# Altium PCB PROC091F.PcbDoc (part 1 of 8)
Units mil, origin at the board's own origin, x right, y up, seen from the top; angles counter-clockwise.
Board outline 3590.95 x 906.17 mil, 8 copper layers (Top Layer, GND1, Sig1, PWR1, PWR2, Sig2, GND2, Bottom Layer), stack 63.146 mil thick; 420 components, 316 nets, 1432 pads, 774 vias.
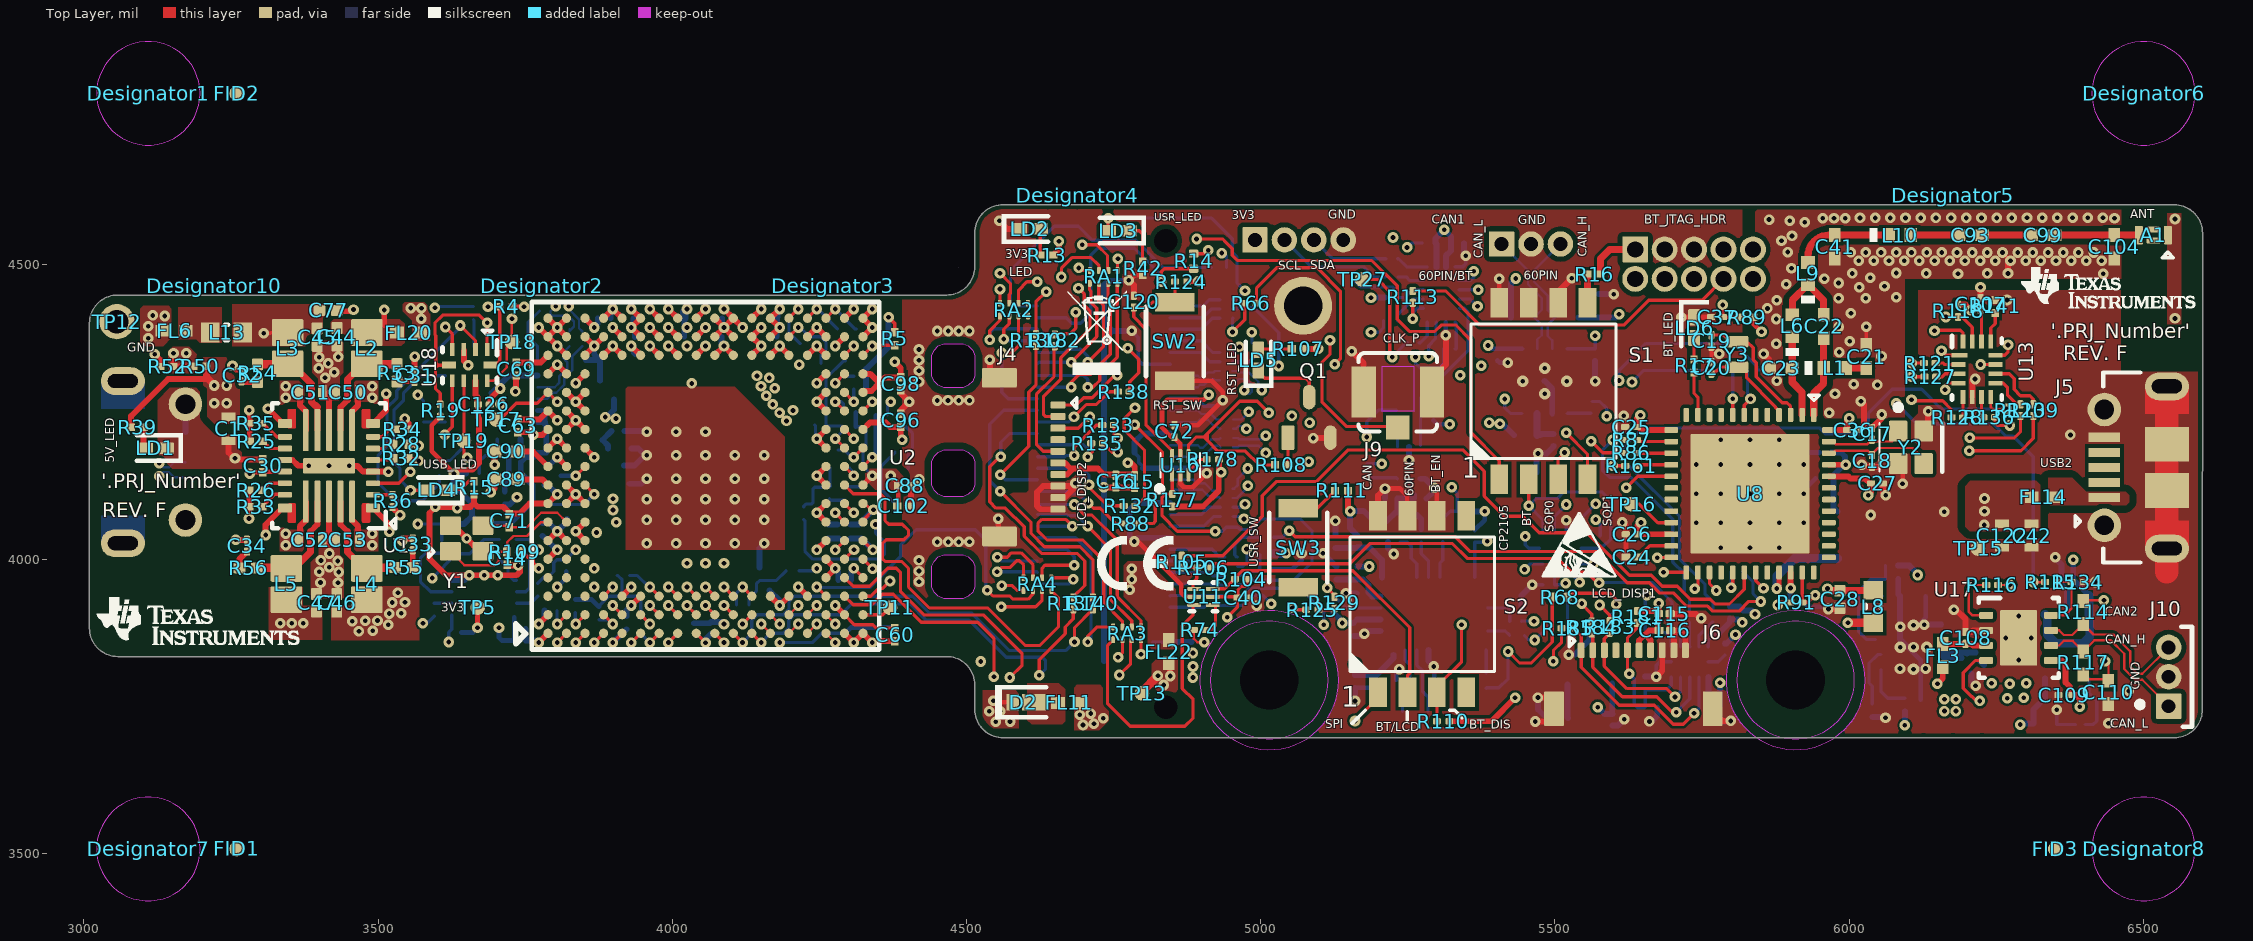
[diagram p0: Top Layer view]
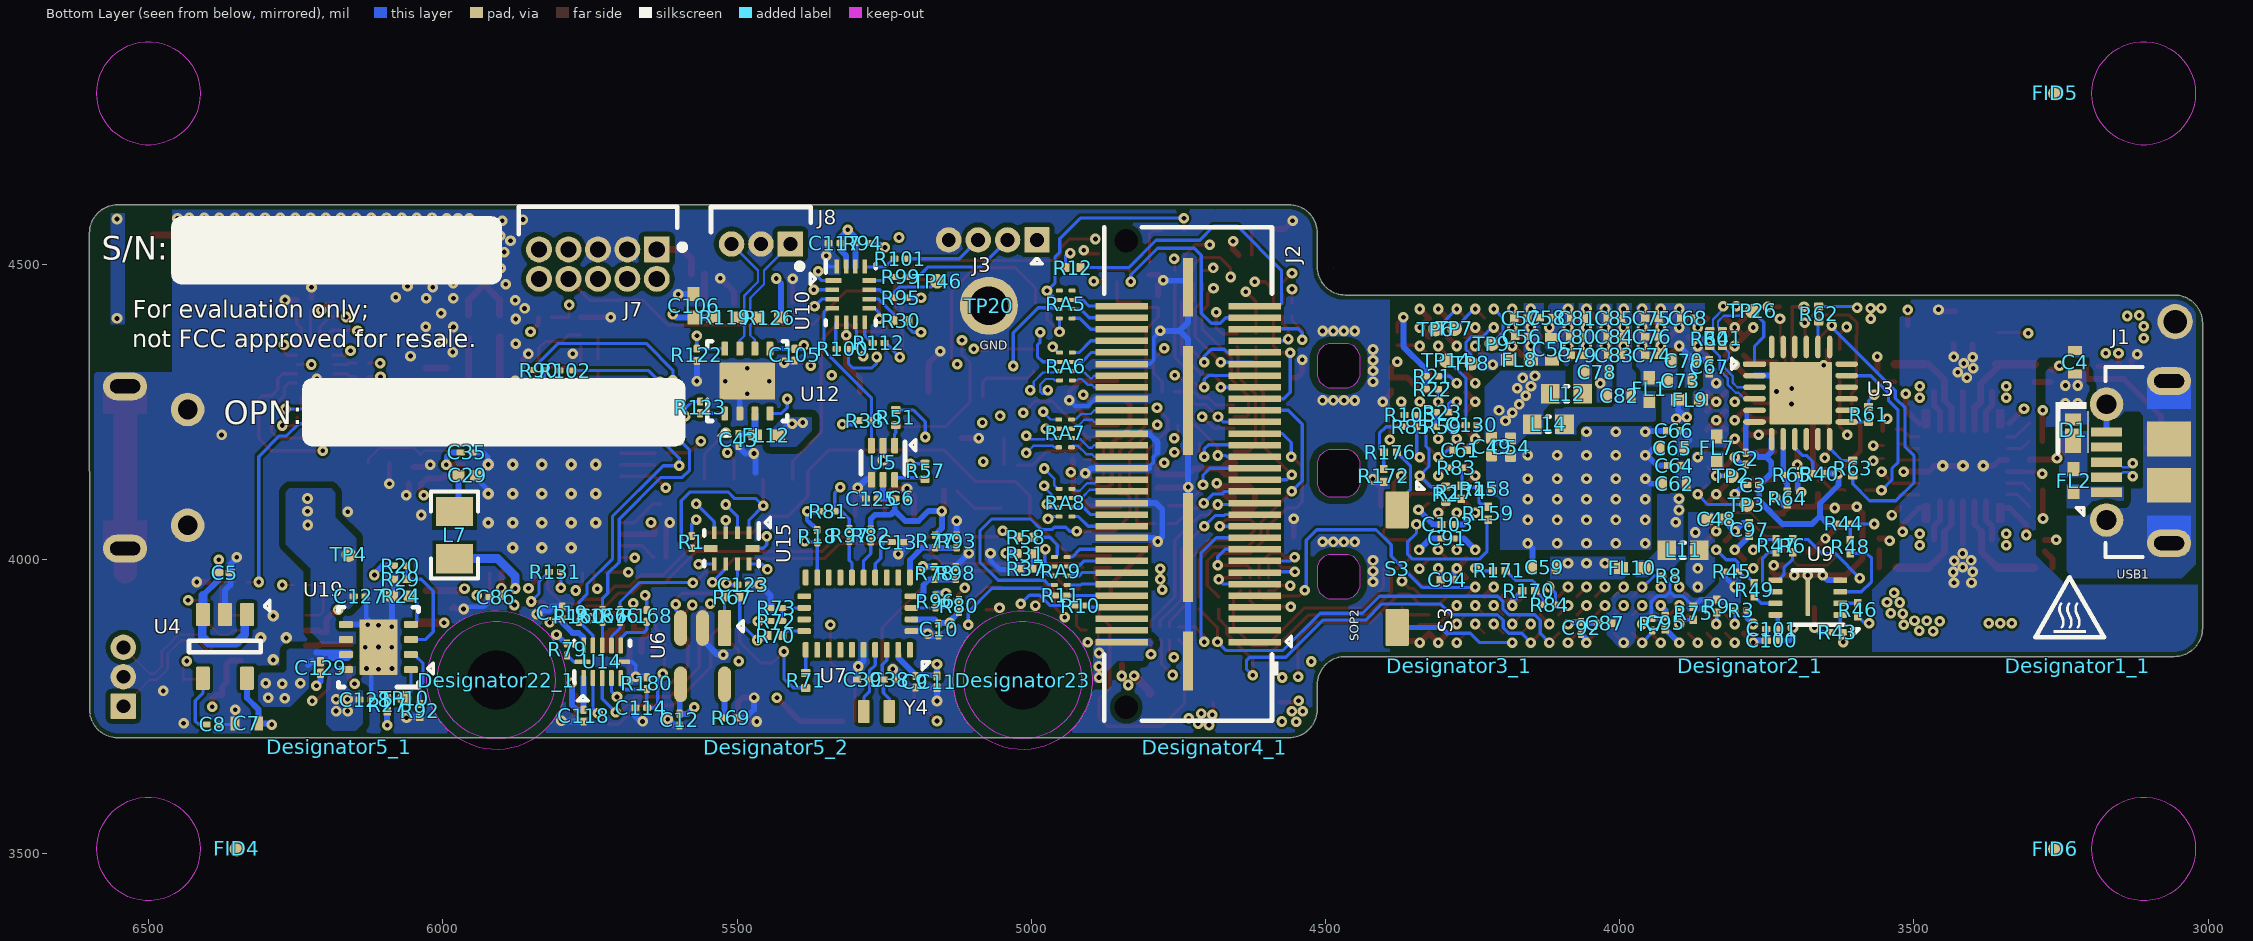
[diagram p1: Bottom Layer view, seen from below]
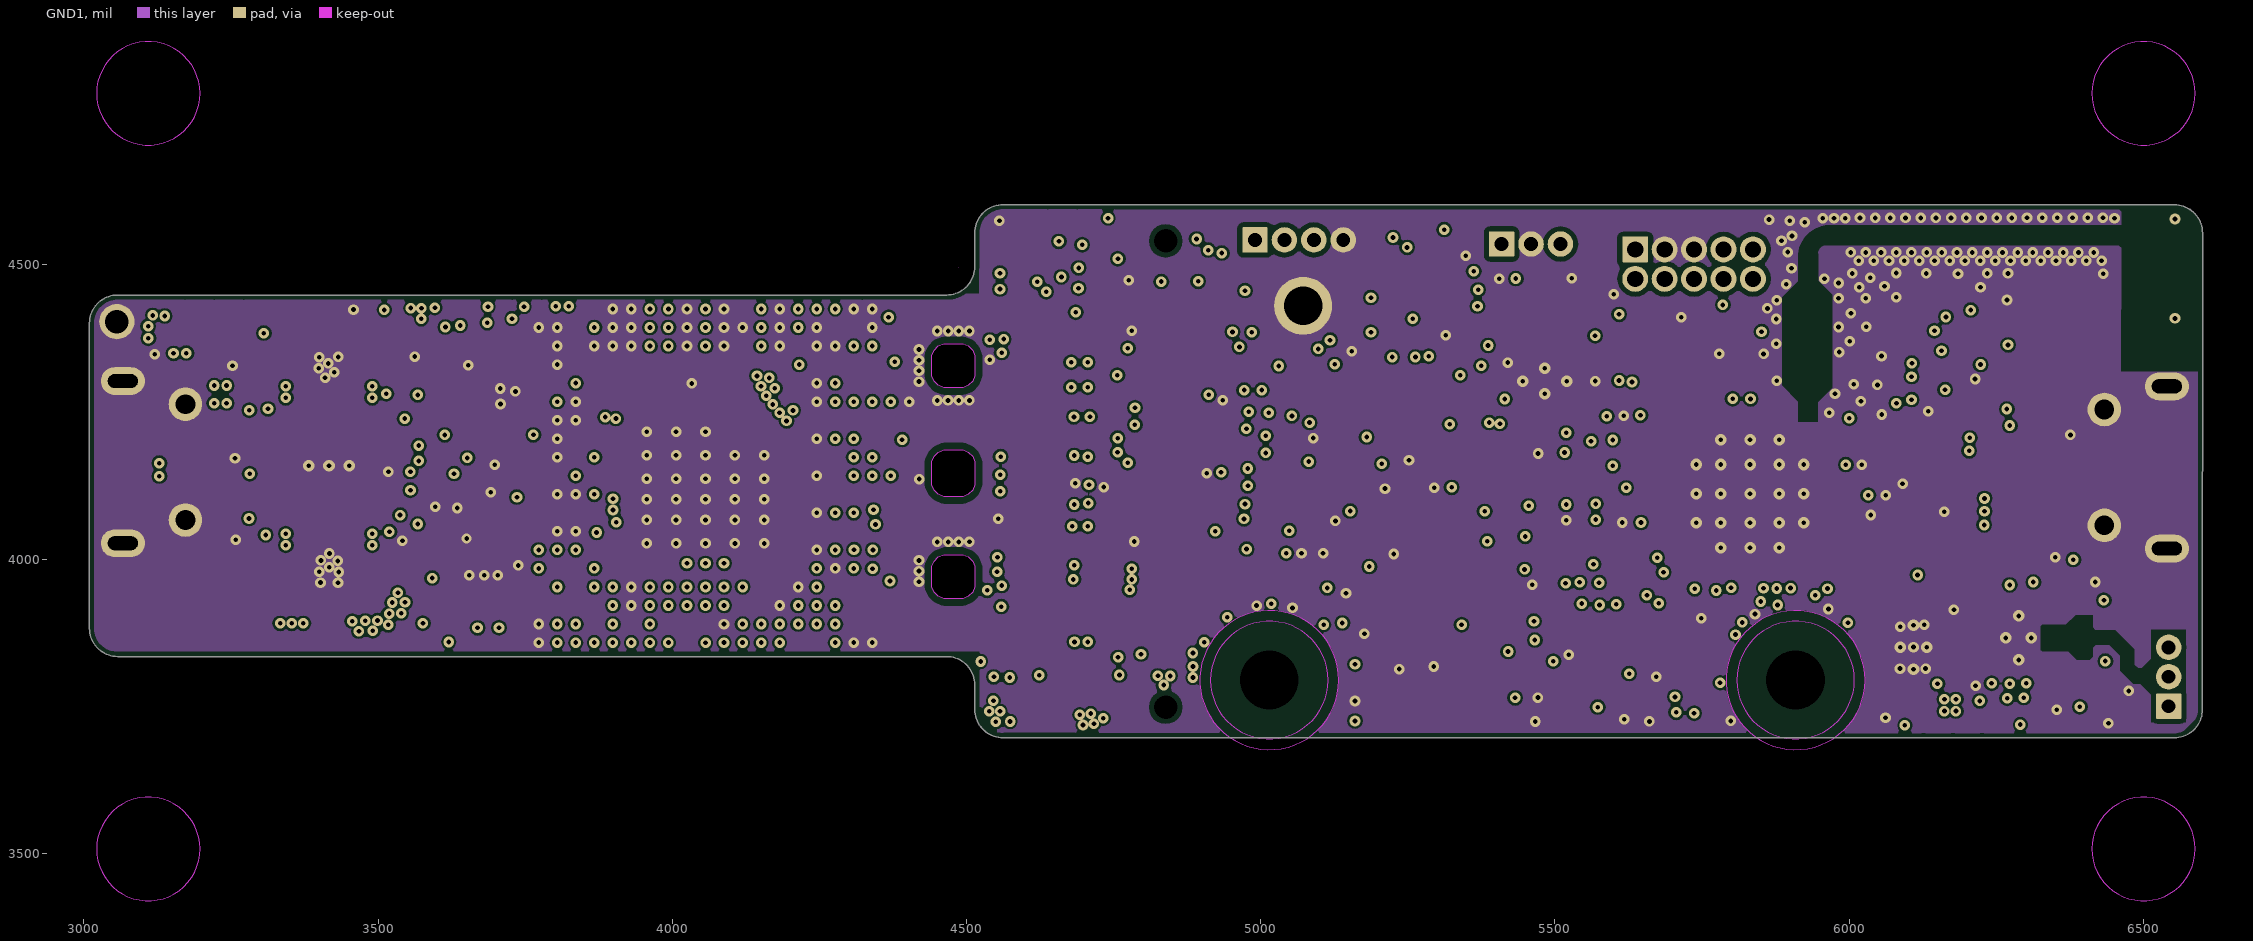
[diagram p2: GND1]
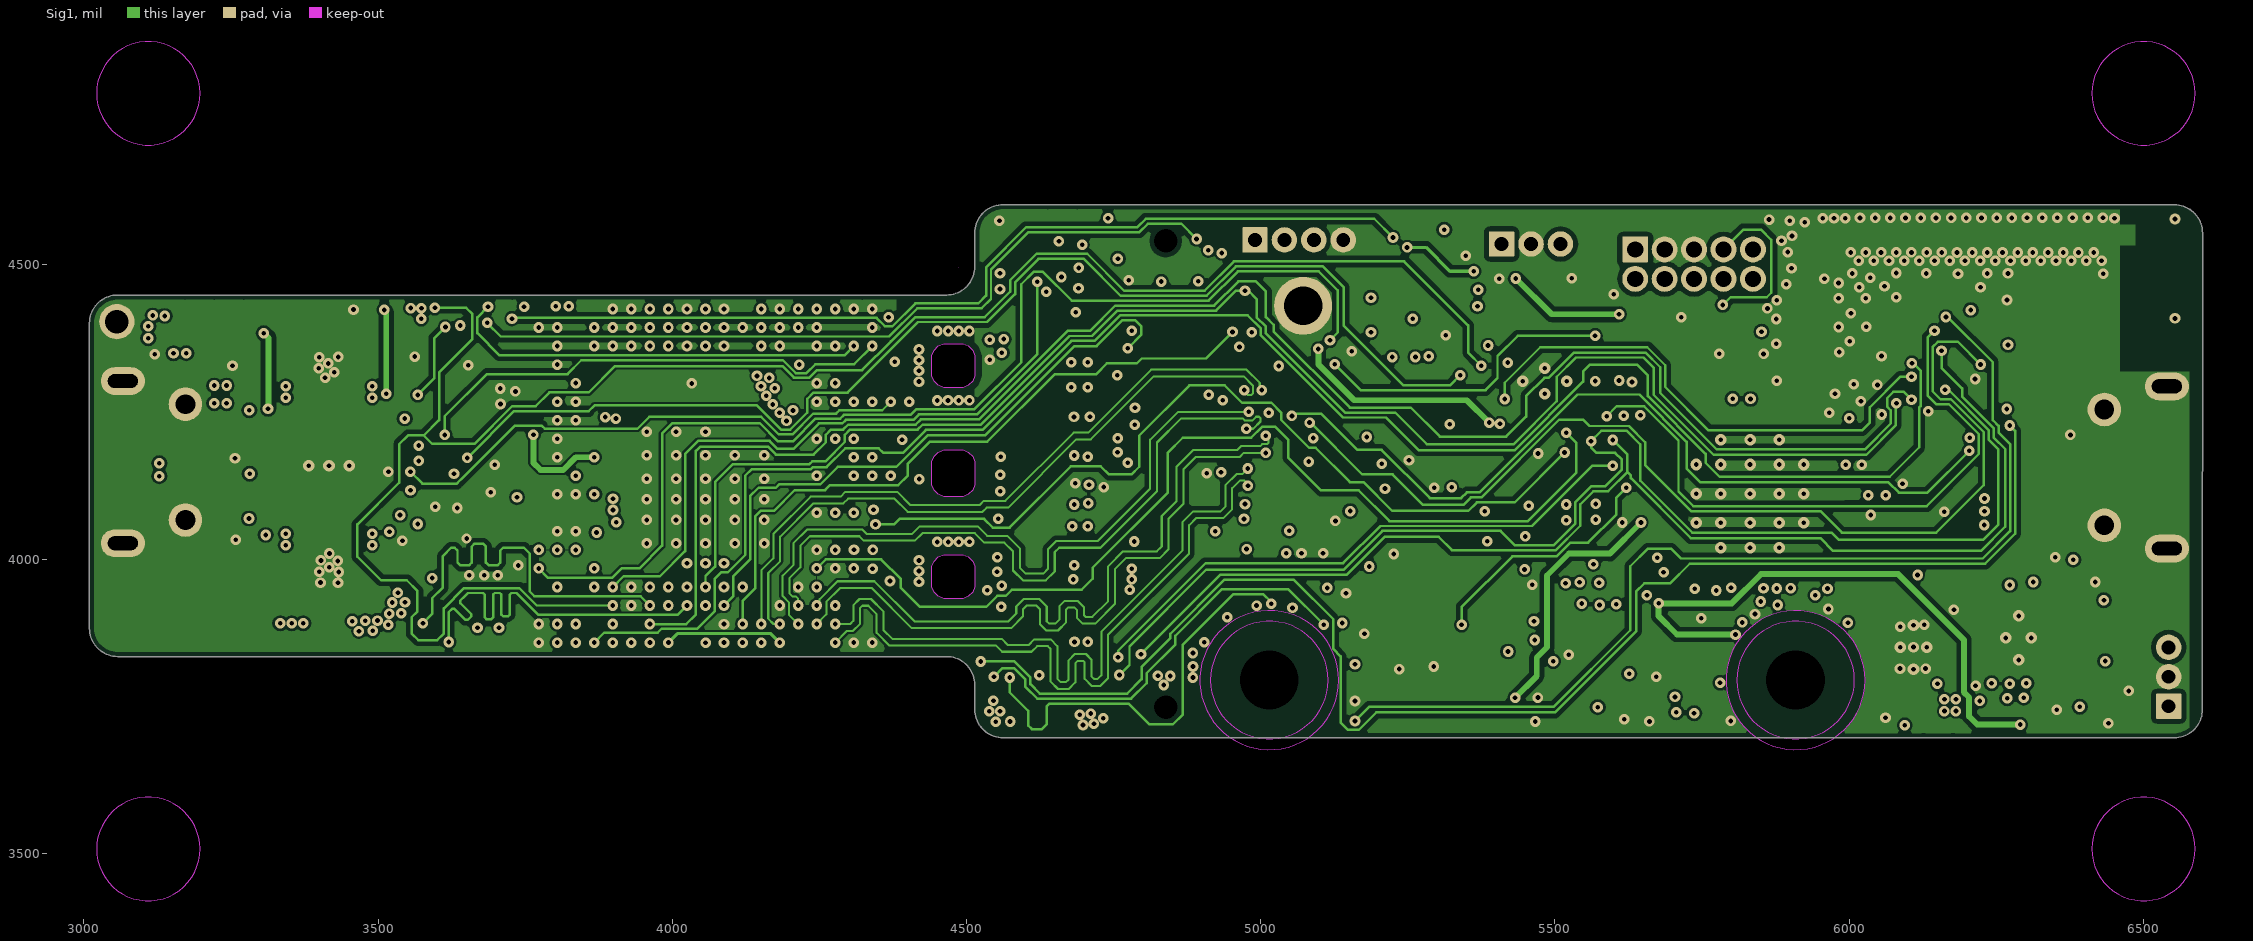
[diagram p3: Sig1]
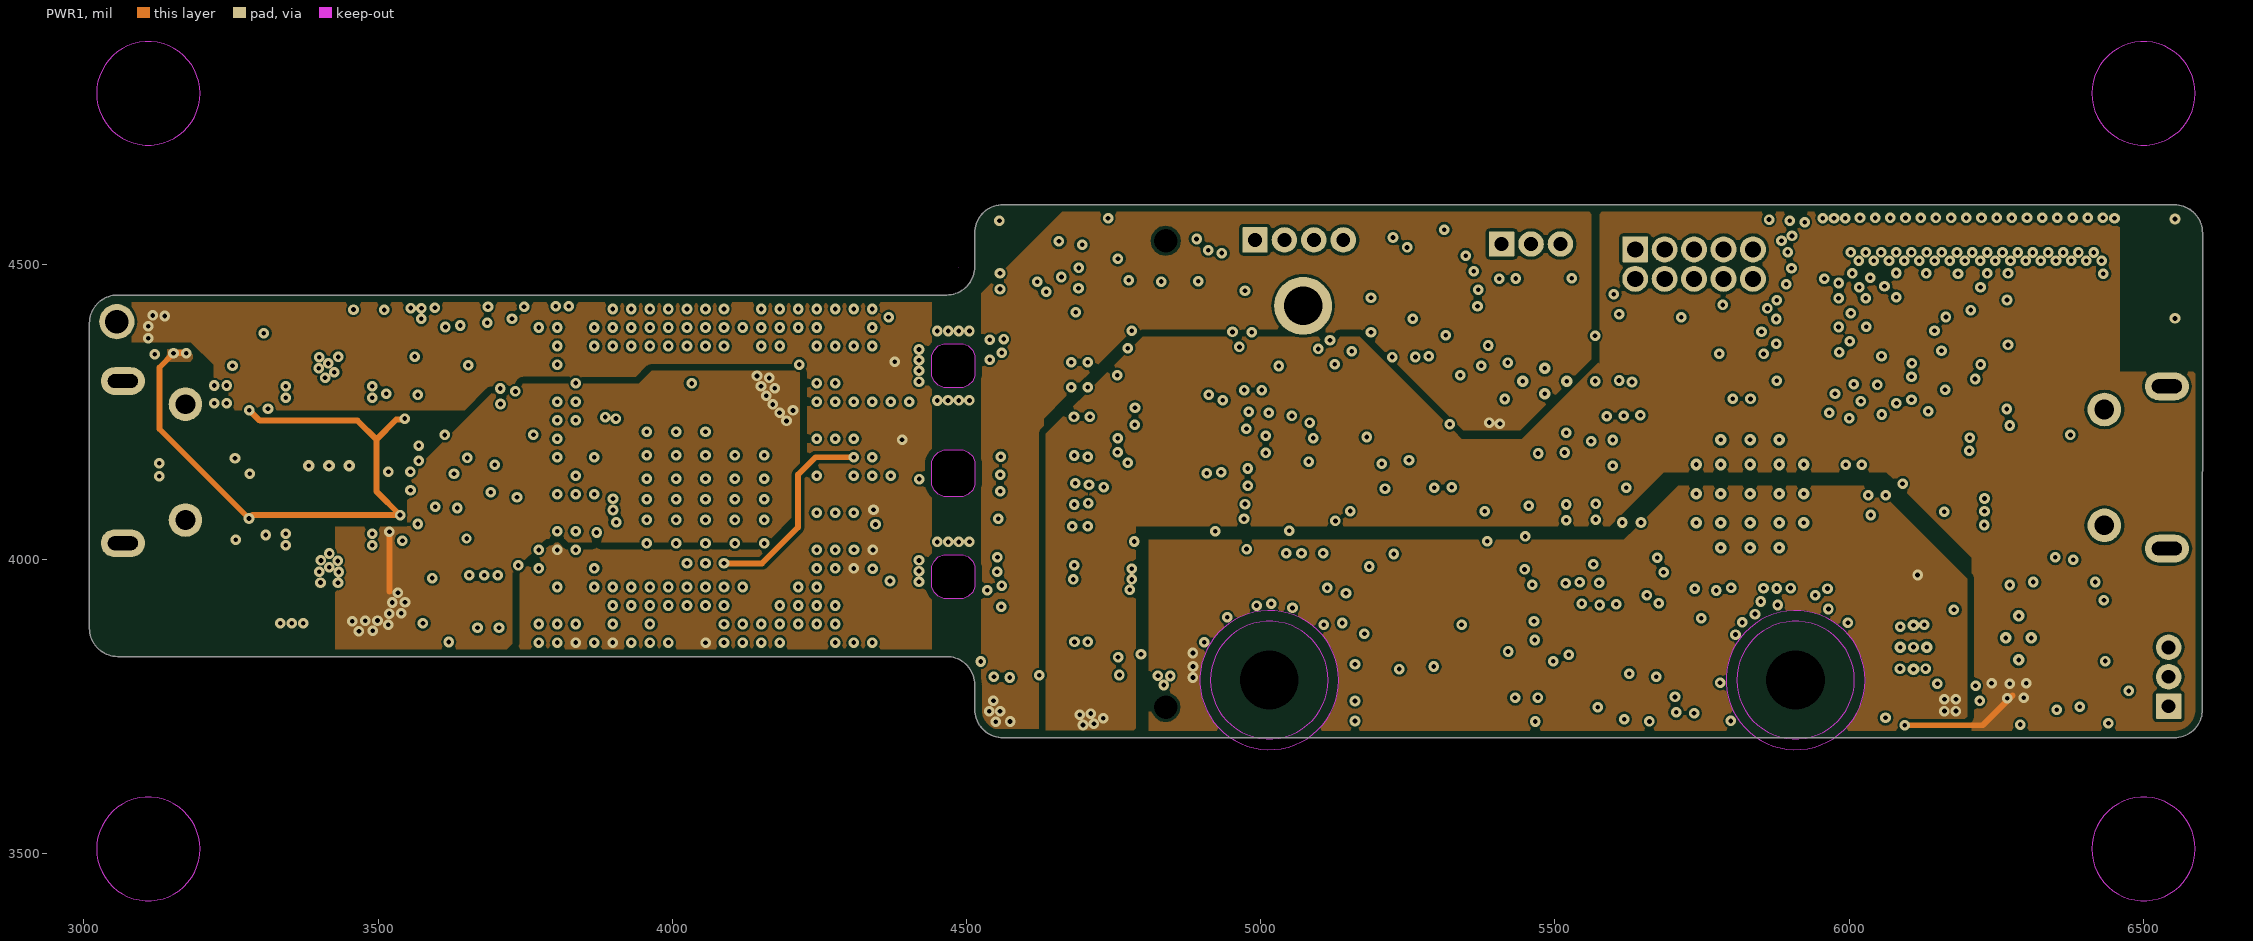
[diagram p4: PWR1]
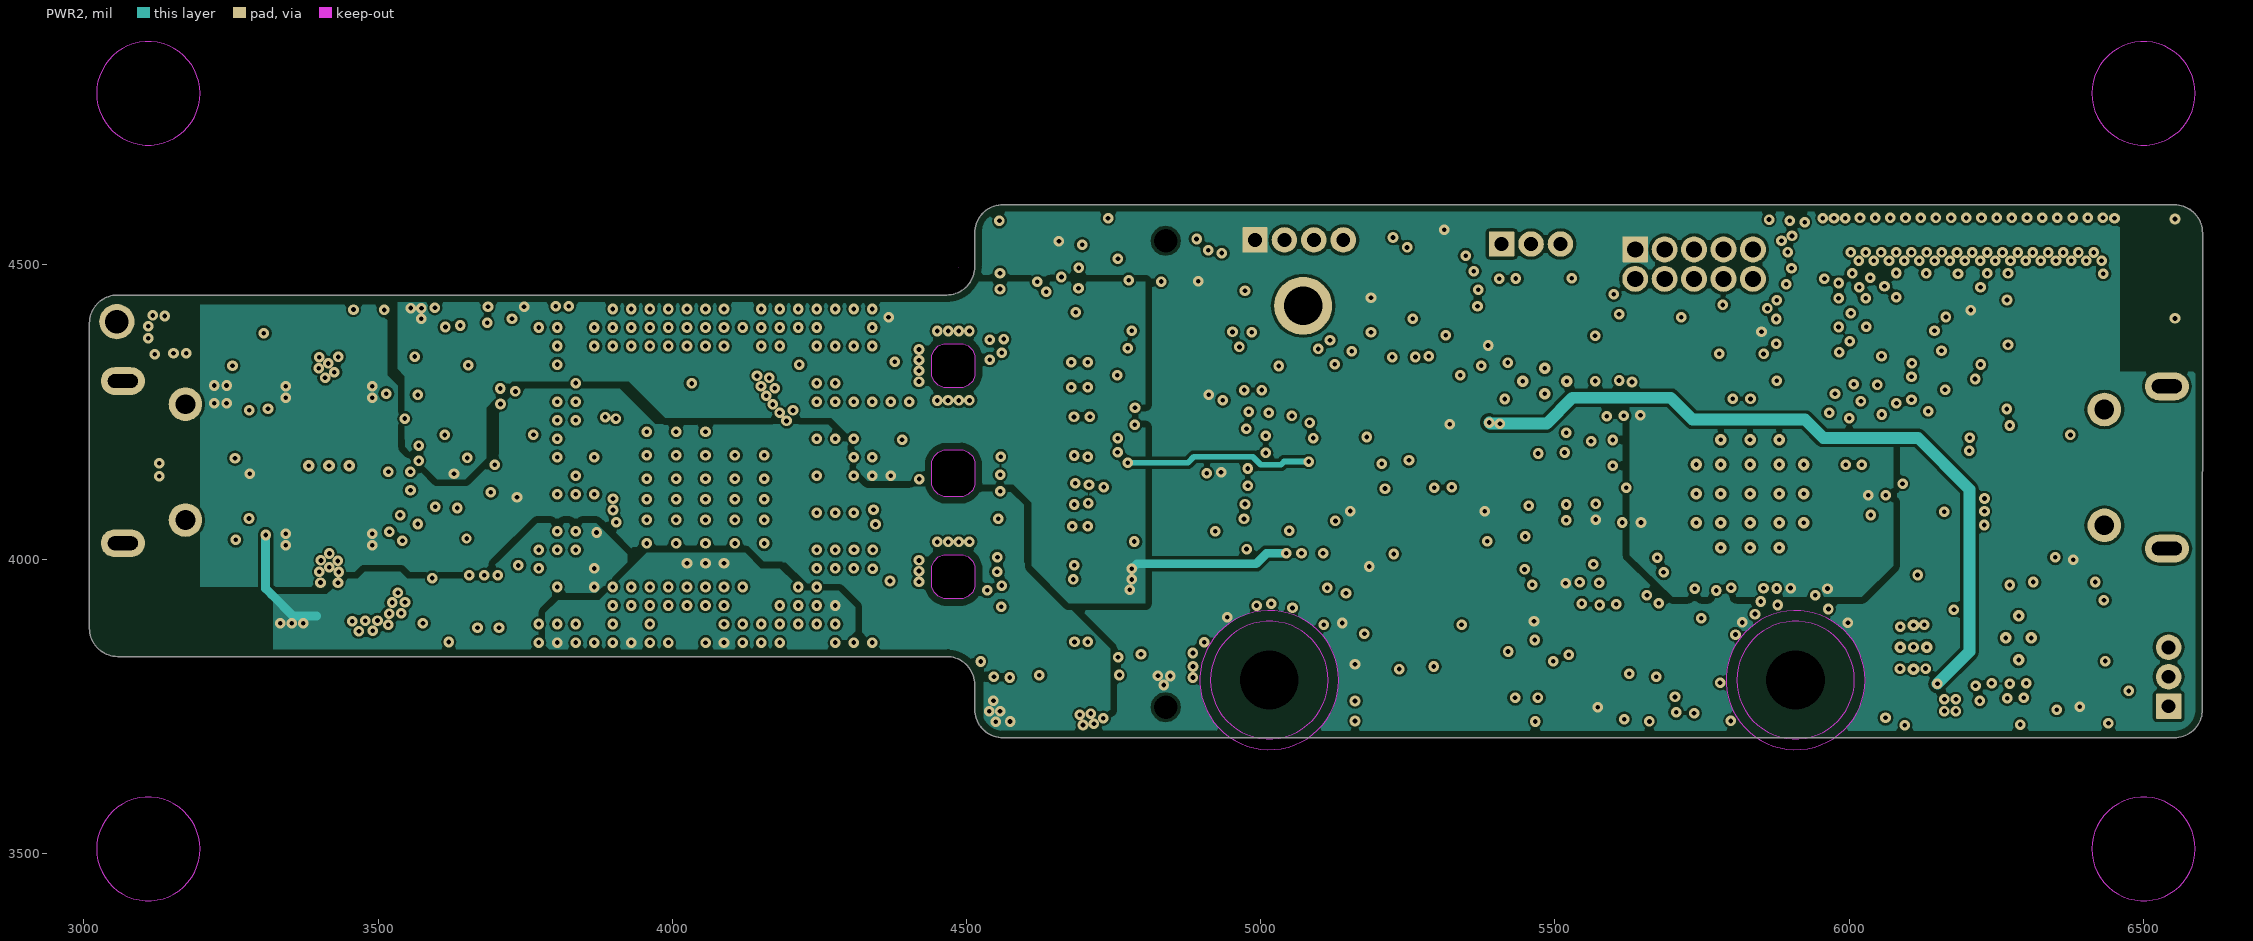
[diagram p5: PWR2]
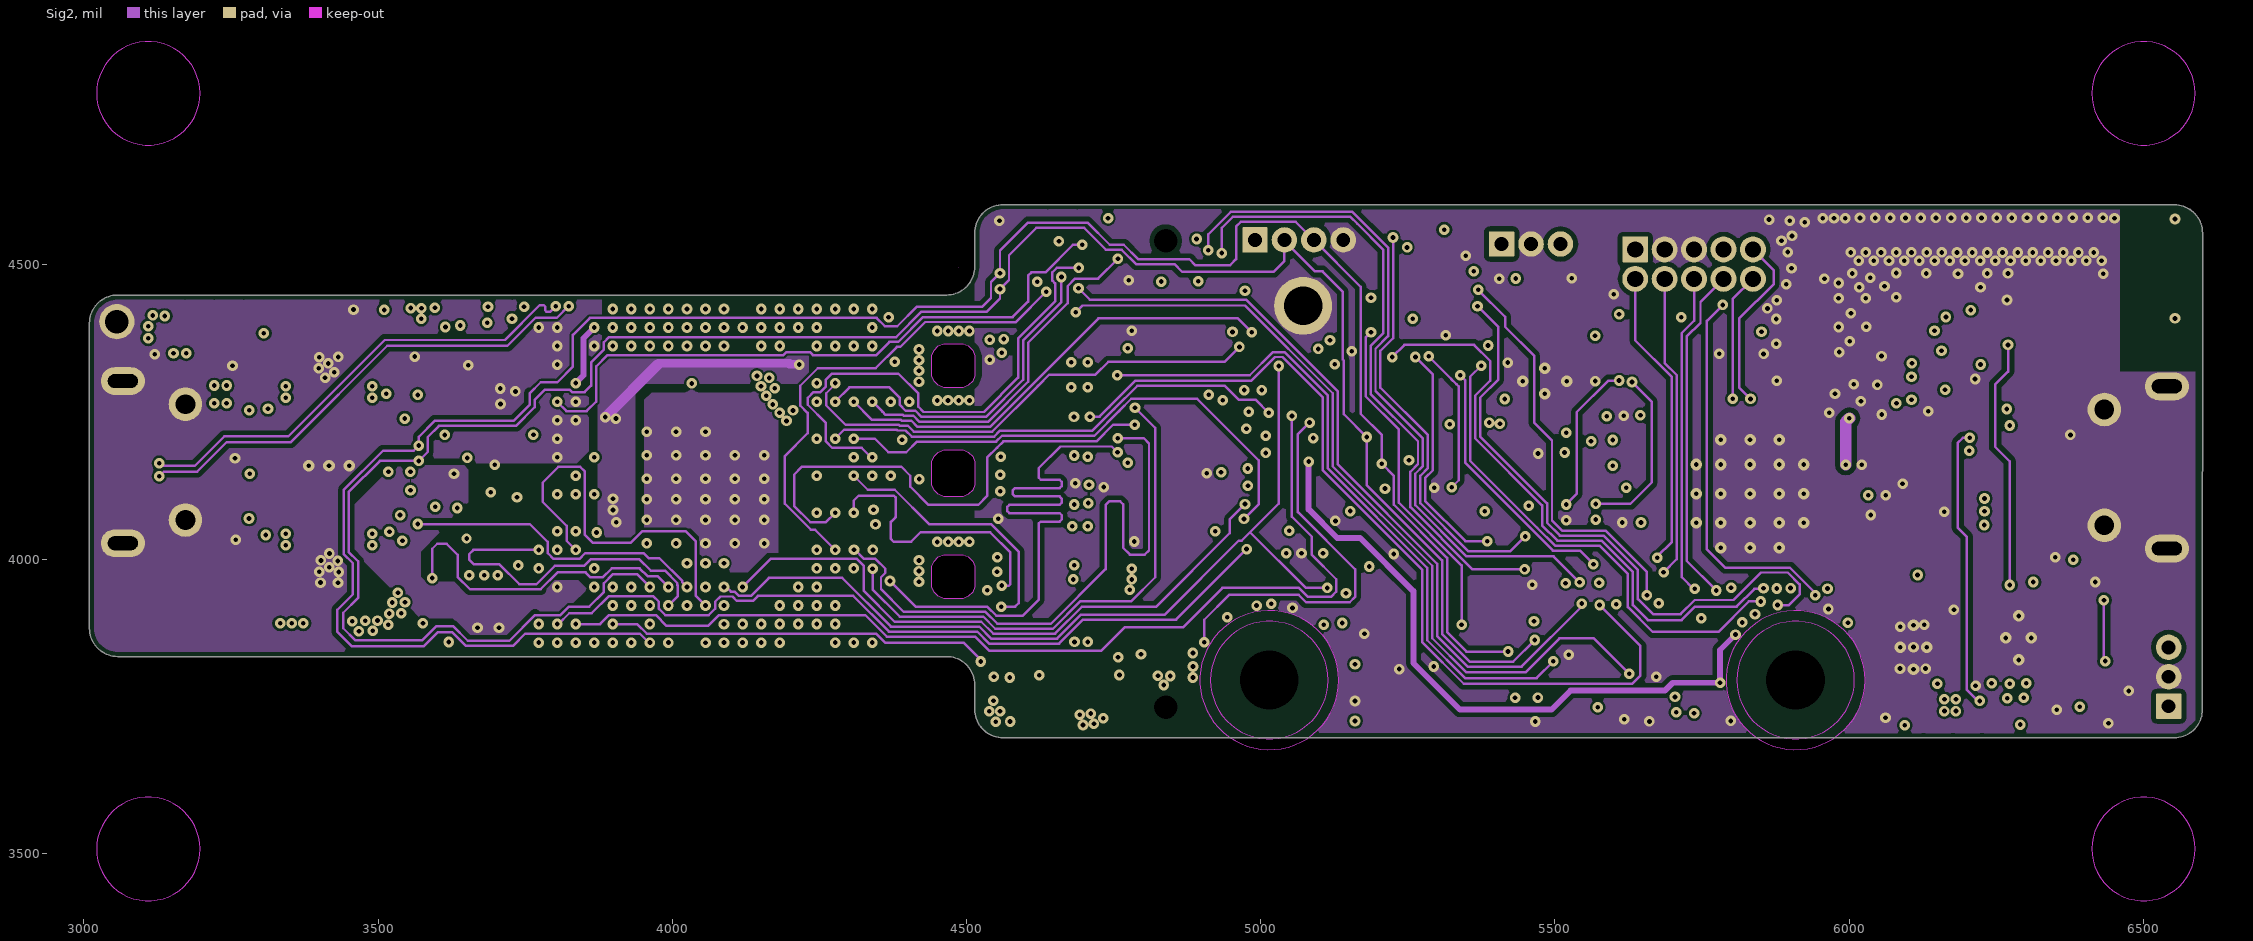
[diagram p6: Sig2]
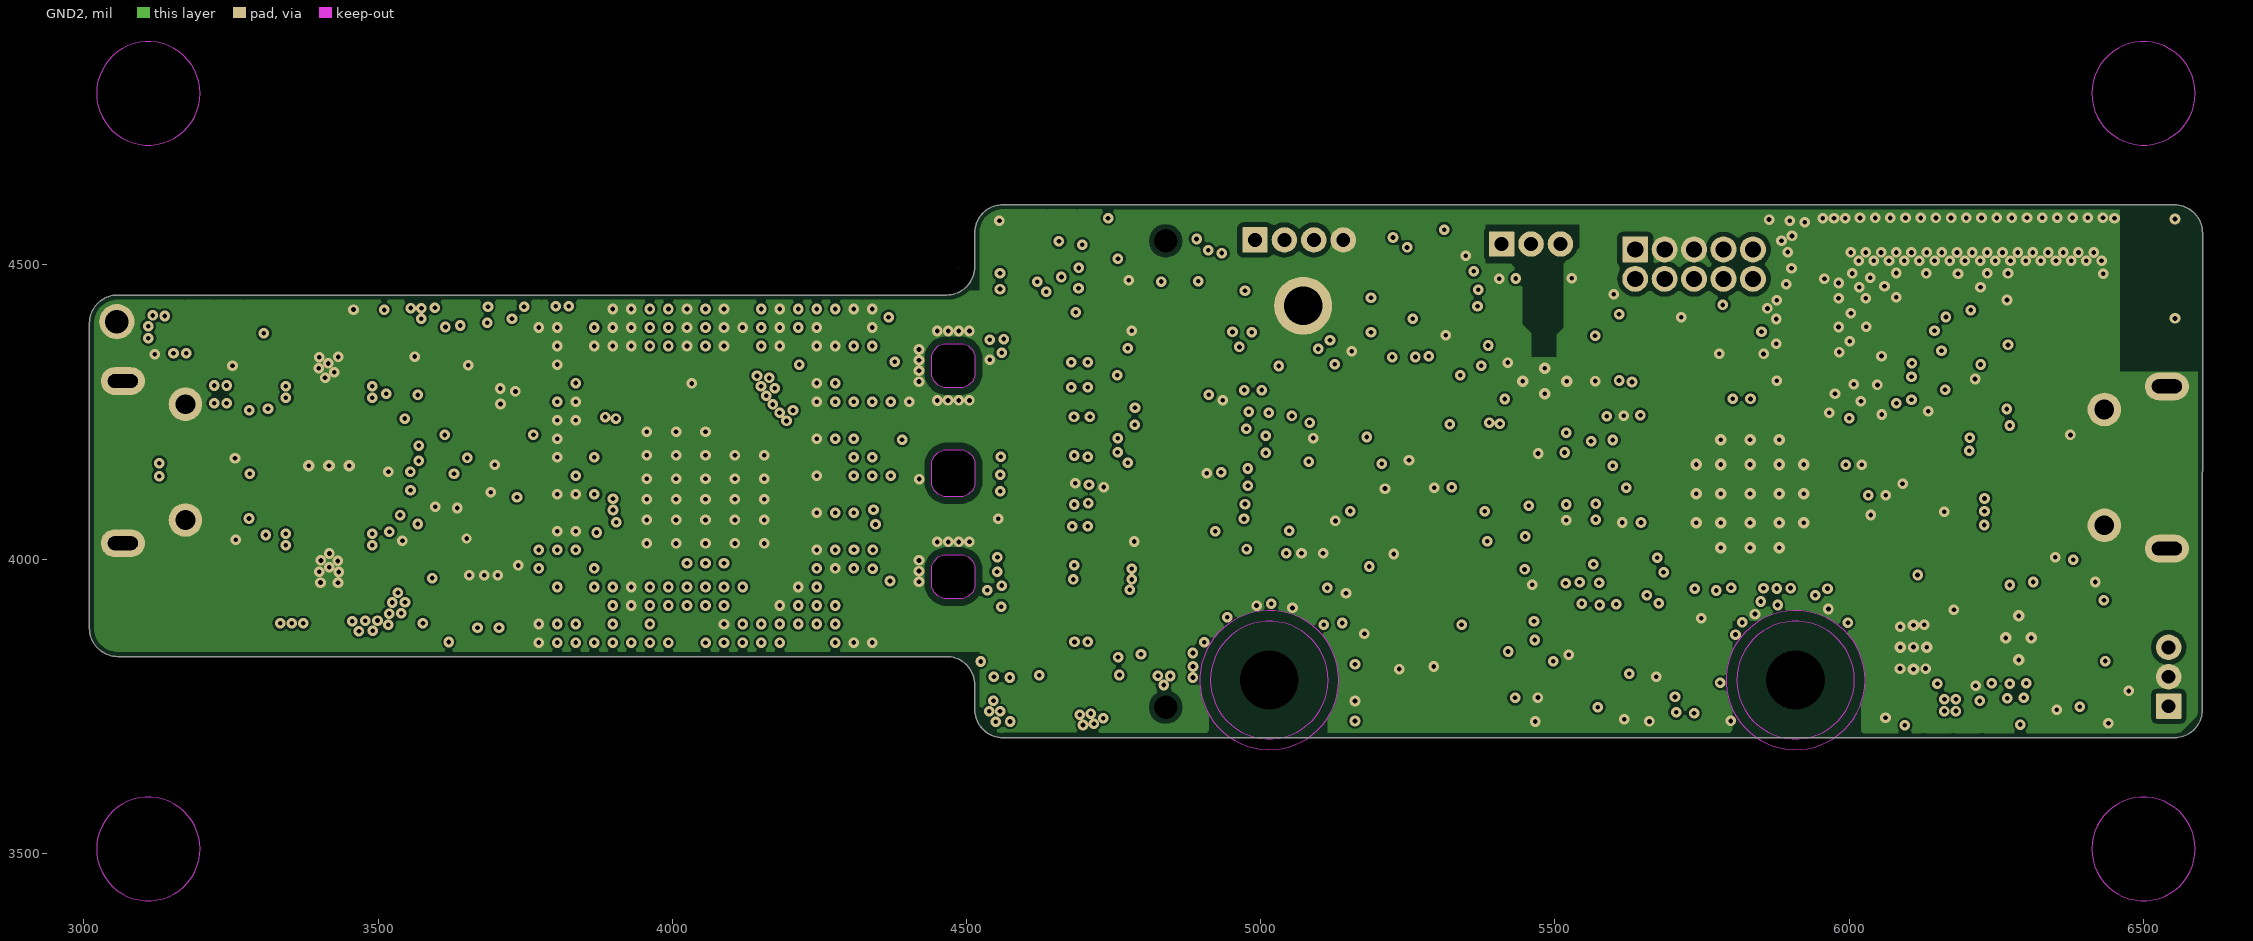
[diagram p7: GND2]

## Layer stack, top to bottom
Top Solder: solder mask 0.5, Solder Resist, Dk 3.5
Top Layer: signal copper 1.373
Dielectric1: core 3.7, FR-4 High Tg, Dk 4.2
GND1: signal copper 2.4
Dielectric3: dielectric 4.5, FR-4 High Tg, Dk 4.2
Sig1: signal copper 1.2
Dielectric2: dielectric 12, FR-4 High Tg, Dk 4.2
PWR1: signal copper 2.4
Dielectric4: dielectric 8, FR-4 High Tg, Dk 4.2
PWR2: signal copper 2.4
Dielectric5: dielectric 12, FR-4 High Tg, Dk 4.2
Sig2: signal copper 1.2
Dielectric8: dielectric 4.5, FR-4 High Tg, Dk 4.2
GND2: signal copper 2.4
Dielectric9: dielectric 3.7, FR-4 High Tg, Dk 4.2
Bottom Layer: signal copper 1.373
Bottom Solder: solder mask 0.5, Solder Resist, Dk 3.5

## Board outline
3057.58,3834.46 4466.14,3834.46 cw(c4466.14,3786.46) 4514.14,3786.46 4514.14,3744.46 ccw(c4562.14,3744.46) 4562.14,3696.46 4562.14,3696.51 6552.27,3696.2 ccw(c6552.27,3744.2) 6600.27,3744.2 6600.29,3744.2 6600.53,4554.1 ccw(c6552.53,4554.1) 6552.53,4602.1 6552.53,4602.08 4562.15,4602.33 4562.15,4602.37 ccw(c4562.15,4554.37) 4514.15,4554.37 4514.15,4496.76 cw(c4466.15,4496.76) 4466.15,4448.76 3057.58,4448.76 ccw(c3057.58,4400.76) 3009.58,4400.76 3009.58,3882.46 ccw(c3057.58,3882.46)
cut-out: 4466.37,4365.95 4494.11,4365.95 4503.29,4362.14 4510.33,4355.11 4514.13,4345.92 4514.13,4340.95 4514.13,4316.3 4514.13,4311.32 4510.33,4302.14 4503.29,4295.1 4494.11,4291.3 4489.13,4291.3 4461.39,4291.3 4452.2,4295.1 4445.17,4302.14 4441.37,4311.32 4441.37,4316.3 4441.37,4340.95 4441.37,4345.92 4445.17,4355.11 4452.2,4362.14 4461.39,4365.95 4466.37,4365.95
cut-out: 4489.13,4185.46 4494.1,4185.46 4503.29,4181.66 4510.32,4174.62 4514.13,4165.44 4514.13,4160.46 4514.13,4131.32 4514.13,4126.35 4510.32,4117.16 4503.29,4110.12 4494.1,4106.32 4489.13,4106.32 4466.36,4106.32 4461.39,4106.32 4452.2,4110.12 4445.17,4117.16 4441.36,4126.35 4441.36,4131.32 4441.36,4160.46 4441.36,4165.44 4445.17,4174.62 4452.2,4181.66 4461.39,4185.46 4489.13,4185.46
cut-out: 4466.36,4007.54 4494.1,4007.54 4503.28,4003.73 4510.32,3996.7 4514.12,3987.51 4514.12,3982.54 4514.12,3957.89 4514.12,3952.91 4510.32,3943.73 4503.28,3936.69 4494.1,3932.89 4489.12,3932.89 4461.38,3932.89 4452.19,3936.69 4445.16,3943.73 4441.36,3952.91 4441.36,3957.89 4441.36,3982.54 4441.36,3987.51 4445.16,3996.7 4452.19,4003.73 4461.38,4007.54 4466.36,4007.54
cut-out: 4477.74,4007.54
cut-out: 4486.41,4495.33

## Design rules (kind name [scope] priority, off if disabled: settings)
AcuteAngle [All] p1: minimum=4.50000000000000E+0001 checktracksonly=TRUE
AssemblyTestPointUsage [All] p1: valid=2
BoardOutlineClearance BoardOutlineClearance_1 [InNet('GND')] p1: gap=8 ignorepadtopadclearanceinfootprint=FALSE
BoardOutlineClearance [NOT(OnTopSilkscreen OR OnBottomSilkscreen)] p2: gap=12 ignorepadtopadclearanceinfootprint=FALSE except(0: Text-OutlineEdge)
Clearance Keepout [(OnLayer('Keep-Out Layer'))] p1: gap=0.01 ignorepadtopadclearanceinfootprint=FALSE except(5.9: THPad-THPad; 7: Arc-THPad Track-THPad THPad-Via; 8: THPad-Fill THPad-Poly THPad-Region)
Clearance RF_TRACE [InNetClass('RF')] p2: gap=4 ignorepadtopadclearanceinfootprint=FALSE except(0: Arc-Hole Track-Hole SMDPad-Hole THPad-Hole Via-Hole Fill-Hole Poly-Hole Region-Hole Text-Hole; 2: Arc-Text Track-Text SMDPad-Text THPad-Text Via-Text Fill-Text Poly-Text Region-Text Text-Text; 5.9: THPad-THPad; 6: SMDPad-Fill SMDPad-Poly SMDPad-Region Via-Fill Via-Poly Via-Region; 7: Arc-THPad Track-THPad THPad-Via; 8: THPad-Fill THPad-Poly THPad-Region; 10: Arc-Fill Arc-Poly Arc-Region Track-Fill Track-Poly Track-Region; 15: Fill-Fill Fill-Poly Fill-Region Poly-Poly Poly-Region Region-Region)
Clearance AOP_T-B [WithinRoom('BGA') vs OnOutside] p3: gap=4 ignorepadtopadclearanceinfootprint=TRUE except(0: Arc-Hole Track-Hole SMDPad-Hole THPad-Hole Via-Hole Fill-Hole Poly-Hole Region-Hole Text-Hole; 3.8: SMDPad-Via; 3.9: Arc-Via Track-Via; 5.9: THPad-THPad; 7: Arc-THPad Track-THPad THPad-Via; 8: THPad-Fill THPad-Poly THPad-Region Fill-Fill Fill-Poly Fill-Region Poly-Poly Poly-Region Region-Region)
Clearance AOP_Sig [WithinRoom('BGA') AND (OnLayer('sig1') or OnLayer('sig2'))] p4: gap=4 ignorepadtopadclearanceinfootprint=FALSE except(0: Arc-Hole Track-Hole SMDPad-Hole THPad-Hole Via-Hole Fill-Hole Poly-Hole Region-Hole Text-Hole; 3.5: Arc-Arc Arc-Track Arc-Via Arc-Text Track-Track Track-Via Track-Text SMDPad-Text THPad-Text Via-Via Via-Text Fill-Text Poly-Text Region-Text Text-Text; 3.8: SMDPad-Via; 5.9: THPad-THPad; 7: Arc-THPad Track-THPad THPad-Via; 8: SMDPad-THPad THPad-Fill THPad-Poly THPad-Region; 15: Fill-Fill Fill-Poly Fill-Region Poly-Poly Poly-Region Region-Region)
Clearance 50E_INNERlayer [(OnLayer('sig1') or OnLayer('Sig2'))] p5: gap=4.2 ignorepadtopadclearanceinfootprint=TRUE except(0: Arc-Hole Track-Hole SMDPad-Hole THPad-Hole Via-Hole Fill-Hole Poly-Hole Region-Hole Text-Hole; 2: SMDPad-Text Fill-Text Poly-Text Region-Text Text-Text; 5.9: THPad-THPad; 6: SMDPad-Fill SMDPad-Poly SMDPad-Region; 7: Arc-THPad Track-THPad THPad-Via; 8: Arc-Fill Arc-Poly Arc-Region Track-Fill Track-Poly Track-Region THPad-Fill THPad-Poly THPad-Region; 12: Fill-Fill Fill-Poly Fill-Region Poly-Poly Poly-Region Region-Region)
Clearance INNERlayer [(OnLayer('pwr1') or OnLayer('pwr2'))] p6: gap=8 ignorepadtopadclearanceinfootprint=TRUE except(0: Arc-Hole Track-Hole SMDPad-Hole THPad-Hole Via-Hole Fill-Hole Poly-Hole Region-Hole Text-Hole; 2: SMDPad-Text Fill-Text Poly-Text Region-Text Text-Text; 4: Via-Fill Via-Poly Via-Region; 4.2: Arc-Text Track-Text THPad-Text Via-Via Via-Text; 5: THPad-Fill THPad-Poly THPad-Region; 5.9: THPad-THPad; 6: Arc-Via Arc-Fill Arc-Poly Arc-Region Track-Via Track-Fill Track-Poly Track-Region; 7: THPad-Via; 12: Fill-Fill Fill-Poly Fill-Region Poly-Poly Poly-Region Region-Region)
Clearance 100E [InDifferentialPairClass('100E')] p7: gap=8 ignorepadtopadclearanceinfootprint=FALSE except(0: Arc-Hole Track-Hole SMDPad-Hole THPad-Hole Via-Hole Fill-Hole Poly-Hole Region-Hole Text-Hole; 2: Arc-Text Track-Text THPad-Text Via-Text Fill-Text Poly-Text Region-Text Text-Text; 4: Arc-SMDPad Track-SMDPad SMDPad-SMDPad SMDPad-THPad SMDPad-Via SMDPad-Text Via-Via Via-Fill Via-Poly Via-Region; 5: Arc-Via Track-Via; 5.9: THPad-THPad; 6: SMDPad-Fill SMDPad-Poly SMDPad-Region Fill-Fill Fill-Poly Fill-Region Poly-Poly Poly-Region Region-Region; 7: Arc-THPad Track-THPad THPad-Via)
Clearance 90E_OUTSIDE [InDifferentialPairClass('90E') vs OnOutside] p8: gap=6 ignorepadtopadclearanceinfootprint=TRUE except(0: Arc-Hole Track-Hole SMDPad-Hole THPad-Hole Via-Hole Fill-Fill Fill-Poly Fill-Region Fill-Hole Poly-Poly Poly-Region Poly-Hole Region-Region Region-Hole Text-Hole; 2: Arc-Text Track-Text SMDPad-Text THPad-Text Via-Text Fill-Text Poly-Text Region-Text Text-Text; 3.8: SMDPad-Via; 4: Arc-SMDPad Track-SMDPad SMDPad-SMDPad Via-Via Via-Fill Via-Poly Via-Region; 4.5: Arc-Arc Arc-Track Arc-Via Track-Track Track-Via; 5.9: THPad-THPad; 7: Arc-THPad Track-THPad SMDPad-THPad THPad-Via; 8: THPad-Fill THPad-Poly THPad-Region)
Clearance [All] p9: gap=1 ignorepadtopadclearanceinfootprint=TRUE except(0: Arc-Hole Track-Hole SMDPad-Hole THPad-Hole Via-Hole Fill-Hole Poly-Hole Region-Hole Text-Hole; 4: SMDPad-SMDPad SMDPad-Via Via-Via Via-Fill Via-Poly Via-Region; 5: Arc-SMDPad Arc-Fill Arc-Poly Arc-Region Track-SMDPad Track-Fill Track-Poly Track-Region; 5.9: THPad-THPad; 6: Arc-Arc Arc-Track Arc-Via Track-Track Track-Via SMDPad-Fill SMDPad-Poly SMDPad-Region; 7: Arc-THPad Track-THPad SMDPad-THPad THPad-Via; 8: THPad-Fill THPad-Poly THPad-Region; 12: Fill-Fill Fill-Poly Fill-Region Poly-Poly Poly-Region Region-Region)
Clearance "SAME NET" [All] p10: gap=0 ignorepadtopadclearanceinfootprint=FALSE except(0.5: SMDPad-Text; 5.9: THPad-THPad)
ComponentClearance ComponentClearance_R199_187 [InComponent('R199') vs InComponent('R187')] p1: gap=-1 collisioncheckmode=3 verticalgap=10 showdistances=FALSE
ComponentClearance ComponentClearance_R188_204 [InComponent('R188') vs InComponent('R204')] p2: gap=-1 collisioncheckmode=3 verticalgap=10 showdistances=FALSE
ComponentClearance [All] p3: gap=1 collisioncheckmode=3 verticalgap=10 showdistances=FALSE
ComponentClearance ComponentClearance_MountingHoles_FiducialMarks [InComponentClass('Mounting Holes') vs InComponentClass('FiducialMark')] p4: gap=50 collisioncheckmode=3 verticalgap=10 showdistances=FALSE
ComponentClearance ComponentClearance_Shunt [InComponentClass('Header') vs InComponentClass('Shunt')] p5: gap=1 collisioncheckmode=3 verticalgap=0 showdistances=FALSE
ComponentClearance ComponentClearance_Logo [InComponentClass('Logo')] p6: gap=50 collisioncheckmode=3 verticalgap=10 showdistances=FALSE
ComponentClearance ComponentClearance_ScrewToNut [(HasFootprint('NY PMS 440 0025 PH')) vs (HasFootprint('Keystone_1902C'))] p7: gap=5 collisioncheckmode=3 verticalgap=10 showdistances=FALSE
ComponentClearance ComponentClearance_MountingHoles [InComponentClass('Mounting Holes')] p8: gap=20 collisioncheckmode=3 verticalgap=100000 showdistances=FALSE
ComponentClearance ComponentClearance_SmallPassives [HasFootprint('0201*') or HasFootprint('0402*') or HasFootprint('0508') or HasFootprint('0603*') or HasFootprint('0612') or HasFootprint('0805*') or HasFootprint('0815*') or HasFootprint('0830*') or HasFootprint('1206*') or HasFootprint('1210*') or HasFootprint('1808*') or HasFootprint('1812*') or HasFootprint('1825*') or HasFootprint('2010*') or HasFootprint('2220*') or HasFootprint('2225*') or HasFootprint('2512*') or HasFootprint('2728*') or HasFootprint('3518*') vs HasFootprint('0201*') or HasFootprint('0402*') or HasFootprint('0508') or HasFootprint('0603*') or HasFootprint('0612') or HasFootprint('0805*') or HasFootprint('0815*') or HasFootprint('0830*') or HasFootprint('1206*') or HasFootprint('1210*') or HasFootprint('1808*') or HasFootprint('1812*') or HasFootprint('1825*') or HasFootprint('2010*') or HasFootprint('2220*') or HasFootprint('2225*') or HasFootprint('2512*') or HasFootprint('2728*') or HasFootprint('3518*')] p9: gap=10 collisioncheckmode=3 verticalgap=10 showdistances=FALSE
ComponentClearance ComponentClearance_THtoSMT [IsThruComponent vs IsSMTComponent] p10: gap=5 collisioncheckmode=3 verticalgap=20 showdistances=FALSE
ComponentClearance ComponentClearance_THtoTH [IsThruComponent vs IsThruComponent] p11: gap=20 collisioncheckmode=3 verticalgap=30 showdistances=FALSE
DiffPairsRouting Diff_100E [InDifferentialPairClass('100E')] p1: maxlimit=10 minlimit=7 mostfreqgap=10 toplayer_maxgap=7 toplayer_prefgap=7 toplayer_minwidth=4 toplayer_maxwidth=4 toplayer_prefwidth=4 midlayer1_mingap=10 midlayer1_minwidth=15 midlayer1_maxwidth=15 midlayer1_prefwidth=15 midlayer2_mingap=8 midlayer2_maxgap=8 midlayer2_prefgap=8 midlayer2_minwidth=3.5 midlayer2_maxwidth=3.5 midlayer2_prefwidth=3.5 midlayer3_mingap=10 midlayer3_minwidth=15 midlayer3_maxwidth=15 midlayer3_prefwidth=15 midlayer6_mingap=10 midlayer6_minwidth=15 midlayer6_maxwidth=15 midlayer6_prefwidth=15 midlayer7_mingap=8 midlayer7_maxgap=8 midlayer7_prefgap=8 midlayer7_minwidth=3.5 midlayer7_maxwidth=3.5 midlayer7_prefwidth=3.5 midlayer8_mingap=10 midlayer8_minwidth=15 midlayer8_maxwidth=15 midlayer8_prefwidth=15 bottomlayer_maxgap=7 bottomlayer_prefgap=7 bottomlayer_minwidth=4 bottomlayer_maxwidth=4 bottomlayer_prefwidth=4 maxuncoupledlength=500
DiffPairsRouting Diff_90E [InDifferentialPairClass('90E')] p2: maxlimit=100 minlimit=4.5 mostfreqgap=10 toplayer_maxgap=4.5 toplayer_prefgap=4.5 toplayer_minwidth=4 toplayer_maxwidth=4 toplayer_prefwidth=4 midlayer1_mingap=10 midlayer1_minwidth=15 midlayer1_maxwidth=15 midlayer1_prefwidth=15 midlayer2_mingap=6 midlayer2_maxgap=6 midlayer2_prefgap=6 midlayer2_minwidth=4 midlayer2_maxwidth=4 midlayer2_prefwidth=4 midlayer3_mingap=10 midlayer3_minwidth=15 midlayer3_maxwidth=15 midlayer3_prefwidth=15 midlayer6_mingap=10 midlayer6_minwidth=15 midlayer6_maxwidth=15 midlayer6_prefwidth=15 midlayer7_mingap=6 midlayer7_maxgap=6 midlayer7_prefgap=6 midlayer7_minwidth=4 midlayer7_maxwidth=4 midlayer7_prefwidth=4 midlayer8_mingap=10 midlayer8_minwidth=15 midlayer8_maxwidth=15 midlayer8_prefwidth=15 bottomlayer_maxgap=4.5 bottomlayer_prefgap=4.5 bottomlayer_minwidth=4 bottomlayer_maxwidth=4 bottomlayer_prefwidth=4 maxuncoupledlength=1000
DiffPairsRouting Diff_120E [All] p3: maxlimit=10 minlimit=6.1 mostfreqgap=10 toplayer_maxgap=6.1 toplayer_prefgap=6.1 toplayer_minwidth=4 toplayer_maxwidth=4 toplayer_prefwidth=4 midlayer1_mingap=10 midlayer1_minwidth=15 midlayer1_maxwidth=15 midlayer1_prefwidth=15 midlayer2_mingap=10 midlayer2_minwidth=15 midlayer2_maxwidth=15 midlayer2_prefwidth=15 midlayer3_mingap=10 midlayer3_minwidth=15 midlayer3_maxwidth=15 midlayer3_prefwidth=15 midlayer6_mingap=10 midlayer6_minwidth=15 midlayer6_maxwidth=15 midlayer6_prefwidth=15 midlayer7_mingap=10 midlayer7_minwidth=15 midlayer7_maxwidth=15 midlayer7_prefwidth=15 midlayer8_mingap=10 midlayer8_minwidth=15 midlayer8_maxwidth=15 midlayer8_prefwidth=15 bottomlayer_maxgap=6.1 bottomlayer_prefgap=6.1 bottomlayer_minwidth=4 bottomlayer_maxwidth=4 bottomlayer_prefwidth=4 maxuncoupledlength=500
FabricationTestPointUsage TestPointUsage [All] p1: valid=2 allowmultiple=FALSE
FabricationTestpoint Testpoint [All] p1: side=3 testpointundercomponent=TRUE minsize=40 maxsize=100 preferedsize=60 minholesize=0 maxholesize=40 preferedholesize=32 testpointgrid=1 allowsidetop=TRUE allowsidebottom=TRUE usegrid=TRUE gridtolerance=0.01
FanoutControl Fanout_LCC [IsLCC] p1: bgadir=Out bgaviamode=Centered fanoutstyle=Auto fanoutdirection=Alternating viagrid=1 // Fanout_LCC (Default Rule)
FanoutControl Fanout_BGA [IsBGA] p2: bgadir=Out bgaviamode=Centered fanoutstyle=Auto fanoutdirection=Alternating viagrid=1 // Fanout_BGA (Default Rule)
FanoutControl Fanout_Default [All] p4: bgadir=Out bgaviamode=Centered fanoutstyle=Auto fanoutdirection=Alternating viagrid=1 // Fanout_Default (Default Rule)
FanoutControl Fanout_Small [(CompPinCount < 5)] p5: bgadir=Out bgaviamode=Centered fanoutstyle=Auto fanoutdirection=OutThenIn viagrid=1 // Fanout_Small (Default Rule)
HoleSize [All] p1: absolutevalues=TRUE maxlimit=251 minlimit=5.9 maxpercent=80.000 minpercent=20.000
MatchedLengths [InNetClass('LVDS_IC')] p1: tolerance=20 checknetsindiffpair=FALSE checkdiffpairvsdiffpair=TRUE checkxsignals=TRUE checkothers=TRUE
MatchedLengths AR_DMM [InxSignalClass('AR_DMM')] p2: tolerance=100 checknetsindiffpair=FALSE checkdiffpairvsdiffpair=TRUE checkxsignals=TRUE checkothers=TRUE
MatchedLengths USB [InxSignalClass('USB')] p3: tolerance=5 checknetsindiffpair=TRUE checkdiffpairvsdiffpair=FALSE checkxsignals=FALSE checkothers=FALSE
MatchedLengths QSPI [InxSignalClass('QSPI')] p4: tolerance=100 checknetsindiffpair=FALSE checkdiffpairvsdiffpair=TRUE checkxsignals=TRUE checkothers=TRUE
MatchedLengths SPI [InxSignalClass('SPI & HOSTINT')] p5: tolerance=200 checknetsindiffpair=FALSE checkdiffpairvsdiffpair=TRUE checkxsignals=TRUE checkothers=TRUE
MatchedLengths JTAG [InxSignalClass('JTAG')] p6: tolerance=100 checknetsindiffpair=FALSE checkdiffpairvsdiffpair=TRUE checkxsignals=TRUE checkothers=TRUE
MinimumAnnularRing MinimumAnnularRing_ThermalPadVias [IsVia and InAnyComponent] p1: minimumring=3
MinimumAnnularRing [All] p2: minimumring=3
MinimumSolderMaskSliver [All] p1: minsoldermaskwidth=3
PlaneConnect [All] p1: planeconnectstyle=Direct reliefexpansion=10 reliefentries=4 reliefconductorwidth=10 reliefairgap=10
PolygonConnect [All] p1: connectstyle=Direct reliefconductorwidth=10 reliefentries=4 polygonreliefangle="90 Angle" airgapwidth=10
RoomDefinition BGA [InComponentClass('60GHz-AOP_IR_FLASH')] p1: confinementstyle=ConfineIn formatcopy=TRUE lockcomponents=FALSE outline 3757.84,4447.61 4382.71,4447.61 4382.71,3834 3757,3834
RoutingVias [All] p1: holewidth=8 width=18 viastyle="Through Hole" minholewidth=7.87 minwidth=17 maxholewidth=40 maxwidth=30
RoutingVias ThermalPadVias [IsVia and InAnyComponent] p2: holewidth=7.87 width=19.68 viastyle="Through Hole" minholewidth=7.87 minwidth=19.68 maxholewidth=12.99 maxwidth=23.62
SilkToBoardRegionClearance [Not ((IsComment or IsDesignator) And (Hide <> 'False')) and not InRegion(1000,500,4000,800)] p1:
SilkToSilkClearance [All] p1: silktosilkclearance=3
SilkToSolderMaskClearance SilkToComponentPadClearance [(IsPad or IsFill or IsRegion) and InAnycomponent] p1: minsilkscreentomaskgap=3 clearancetoexposedcopper=TRUE
SilkToSolderMaskClearance "Silk to Solder Mask Opening" [All] p2: minsilkscreentomaskgap=3 clearancetoexposedcopper=FALSE
SolderMaskExpansion [All] p1: expansion=1.97
Width RF [InNetClass('RF')] p1: maxlimit=100 minlimit=5.5 preferedwidth=10 toplayer_prefwidth=12 midlayer1_minwidth=10 midlayer1_maxwidth=10 midlayer2_minwidth=10 midlayer2_maxwidth=10 midlayer3_minwidth=10 midlayer3_maxwidth=10 midlayer6_minwidth=10 midlayer6_maxwidth=10 midlayer7_minwidth=10 midlayer7_maxwidth=10 midlayer8_minwidth=10 midlayer8_maxwidth=10 bottomlayer_minwidth=10 bottomlayer_maxwidth=10 minimp=50.000000 maximp=50.000000 favimp=50.000000
Width [All] p2: maxlimit=100 minlimit=4 preferedwidth=6 toplayer_maxwidth=40 toplayer_prefwidth=5.5 midlayer1_minwidth=4.2 midlayer1_maxwidth=20 midlayer1_prefwidth=4.2 midlayer2_minwidth=4.2 midlayer2_maxwidth=20 midlayer2_prefwidth=4.2 midlayer7_minwidth=4.2 midlayer7_maxwidth=20 midlayer7_prefwidth=4.2 midlayer8_minwidth=6 midlayer8_prefwidth=10 bottomlayer_maxwidth=40 bottomlayer_prefwidth=5.5 minimp=50.000000 maximp=50.000000 favimp=50.000000
15 further rules are at their usual default settings.

## Classes and differential pairs
net class LVDS_CONN: NetJ2_28 NetJ2_30 NetJ2_34 NetJ2_36 NetJ2_40 NetJ2_42 NetJ2_46 NetJ2_48
net class LVDS_IC: AR_LVDS_0_N AR_LVDS_0_P AR_LVDS_1_N AR_LVDS_1_P AR_LVDS_CLK_N AR_LVDS_CLK_P AR_LVDS_FRCLK_N AR_LVDS_FRCLK_P
differential pair class 120E: CAN CAN2
differential pair class 100E: AR_LVDS_0 AR_LVDS_1 AR_LVDS_CLK AR_LVDS_FRCLK AR_XTAL X48M
differential pair class 90E: NewDifferentialPair1 USB
net class RF: NetA1_4 NetC21_2 NetC22_1 NetC41_1 NetC93_1 NetC93_2 RF_N RF_P
component class PROC091F_RST_GPIOs_I2C: C6 C9 C10 C11 C12 C13 C38 C39 C72 C120 C125 J3 LD2 LD3 LD5 Q1 R13 R18 R38 R42 R51 R57 R67 R68 R69 R70 R71 R72 R73 R77 R78 R80 R81 R82 R93 R96 R97 R98 R107 R108 R111 R124 R125 R129 R177 R178 SW2 SW3 TP15 TP20 U5 U6 U7 U16 Y4
component class PROC091F_PMIC: C30 C31 C32 C33 C34 C44 C45 C46 C47 C48 C49 C50 C51 C52 C53 C54 C77 FL1 FL8 FL9 FL10 FL20 L2 L3 L4 L5 L11 L12 L13 L14 LD1 R25 R26 R28 R31 R32 R33 R34 R35 R36 R37 R39 R50 R52 R53 R54 R55 R56 TP5 TP12 U1
component class PROC091F_HD_CONN_PWR_SW: C127 C128 C129 D2 FL11 FL22 J2 R10 R11 R12 R14 R20 R24 R27 R29 R58 R88 R92 R130 R132 R133 R135 R137 R138 R140 RA1 RA2 RA3 RA4 RA5 RA6 RA7 RA8 RA9 TP10 TP13 U19
component class PROC091F_FLASH_USB_TO_UART: C1 C2 C3 C4 C100 C101 C126 D1 FL2 J1 LD4 R6 R15 R19 R40 R41 R43 R44 R45 R46 R47 R48 R49 R60 R61 R62 R63 R64 R65 TP18 TP19 TP26 U3 U9 U18
component class PROC091F_CAN_INTERFACE: C40 C43 C105 C106 C107 C108 C109 C110 FL3 FL12 J8 J10 R66 R74 R104 R105 R106 R114 R115 R116 R117 R118 R119 R120 R121 R122 R123 R126 R127 R128 R134 R136 R139 R141 U11 U12 U13 U17
component class PROC091F_BT_DISPLAY: A1 C5 C7 C8 C15 C16 C17 C18 C19 C20 C21 C22 C23 C24 C25 C26 C27 C28 C29 C35 C36 C37 C41 C86 C93 C99 C104 C114 C115 C116 C117 C118 C119 J4 J6 J7 L1 L6 L7 L8 L9 L10 LD6 R17 R30 R76 R79 R86 R87 R89 R90 R91 R94 R95 R99 R100 R101 R102 R110 R112 R113 R131 R160 R161 R166 R168 R180 R181 R182 R183 R184 R185 TP16 TP27 TP46 U4 U8 U10 U14 Y2 Y3
component class PROC091F_AOP_PWR: C55 C56 C57 C58 C59 C60 C61 C62 C63 C64 C65 C66 C67 C68 C69 C70 C73 C74 C75 C76 C78 C79 C80 C81 C82 C83 C84 C85 C87 C88 C89 C90 C91 C92 C94 C95 C96 C97 C98 C102 C103 FL6 FL7 TP11
component class PROC091F_AOP_IO: C14 C71 C130 J9 R2 R3 R4 R5 R7 R8 R9 R21 R22 R23 R59 R75 R83 R84 R85 R103 R109 R158 R159 R170 R171 R172 R174 R176 S3 TP2 TP3 TP6 TP7 TP8 TP9 TP14 TP17 U2 Y1
component class PROC091F_ANALOG_MUX: C42 C122 C123 FL14 J5 R1 R16 S1 S2 TP4 U15
component class PROC091F_Hardware: FID1 FID2 FID3 FID4 FID5 FID6 ZZ1 ZZ2 ZZ3 ZZ4 ZZ5.1 ZZ5.2
component class FiducialMark: FID1 FID2 FID3 FID4 FID5 FID6
component class AssemblyNote: ZZ1 ZZ2 ZZ3 ZZ4 ZZ5.1 ZZ5.2
differential pair CAN2: +NetJ10_1 -NetJ10_3
differential pair NewDifferentialPair1: +NetR41_1 -NetR60_1
differential pair USB: +USB_DM -USB_DP
differential pair CAN: +NetJ8_1 -NetJ8_3
differential pair X48M: +X48M_N -X48M_P
differential pair AR_XTAL: +AR_XTAL_N -AR_XTAL_P
differential pair AR_LVDS_FRCLK: +AR_LVDS_FRCLK_N -AR_LVDS_FRCLK_P
differential pair AR_LVDS_CLK: +AR_LVDS_CLK_N -AR_LVDS_CLK_P
differential pair AR_LVDS_1: +AR_LVDS_1_N -AR_LVDS_1_P
differential pair AR_LVDS_0: +AR_LVDS_0_N -AR_LVDS_0_P

## Components (designator, comment, footprint, x,y, rotation, side; value= is the part's Value field where it differs from the comment)
A1 "ANT016008LCS2442MA2" FP-ANT016008LCS2442MA2_SMT_ANT-0 6517.1,4550.46 r180 top
C1 "CL05A106MP5NUNC" 0402_070 3245.8,4221.22 r90 top value=10uF
C2 "GRM033R6YA104KE14D" "FP-GRM033R6YA104KE14D_0201 (0603 Metric)-IPC_C" 3785.88,4170.74 r90 bottom
C3 "GRM033R6YA104KE14D" "FP-GRM033R6YA104KE14D_0201 (0603 Metric)-IPC_C" 3772.95,4125.72 r180 bottom
C4 "CL05A106MP5NUNC" 0402_070 3226.3,4334.4 r90 bottom value=10uF
C5 "CL03A105MO3NRNH" FP-CL03A105MO3NRNH_0201-IPC_C 6371,3977 r180 bottom
C6 "GRM033R6YA104KE14D" "FP-GRM033R6YA104KE14D_0201 (0603 Metric)-IPC_C" 5221.01,4103.02 r0 bottom locked
C7 "CL05A106MP5NUNC" 0402_070 6332.97,3720.79 r0 bottom value=10uF
C8 "CL03A103KA3NNNC" FP-CL03A103KA3NNNC_0201-IPC_C 6391.38,3719.01 r180 bottom
C9 "GRM033R6YA104KE14D" "FP-GRM033R6YA104KE14D_0201 (0603 Metric)-IPC_C" 5197.1,3791.56 r90 bottom locked
C10 "GRM033R6YA104KE14D" "FP-GRM033R6YA104KE14D_0201 (0603 Metric)-IPC_C" 5157.67,3880.39 r90 bottom locked
C11 "CL03A105MO3NRNH" FP-CL03A105MO3NRNH_0201-IPC_C 5160.25,3791.5 r270 bottom locked
C12 "GRM033R6YA104KE14D" "FP-GRM033R6YA104KE14D_0201 (0603 Metric)-IPC_C" 5598.06,3727.05 r90 bottom
C13 "GRM033R6YA104KE14D" "FP-GRM033R6YA104KE14D_0201 (0603 Metric)-IPC_C" 5227.18,4028.9 r0 bottom
C14 "GRM0335C1H4R7BA01D" 0201_033L 3719.34,4001.36 r90 top value=4.7pF
C15 "CL03A105MO3NRNH" FP-CL03A105MO3NRNH_0201-IPC_C 4785.89,4131.62 r270 top locked
C16 "CL03A105MO3NRNH" FP-CL03A105MO3NRNH_0201-IPC_C 4753.82,4132.42 r270 top locked
C17 "GRM0335C1H8R0BA01D" "FP-GRM0335C1H8R0BA01D_0201 (0603 metric)-IPC_C" 6038.8,4212.94 r90 top
C18 "GRM0335C1H8R0BA01D" "FP-GRM0335C1H8R0BA01D_0201 (0603 metric)-IPC_C" 6038.8,4166.75 r270 top
C19 "250R05L120JV4T" FP-250R05L120JV4T_0201-IPC_C 5765.79,4370.87 r270 top
C20 "250R05L120JV4T" FP-250R05L120JV4T_0201-IPC_C 5765.79,4324.98 r90 top
C21 "CL05C120JB5NNNC" 0402L 6028.92,4344.09 r270 top value=12pF
C22 "GCM1555C1H1R0CA16D" 0402L 5956.7,4395.47 r270 top value=1pF
C23 "GCM1555C1H1R0CA16D" 0402L 5883.59,4324.42 r180 top value=1pF
C24 "CL03A105MO3NRNH" FP-CL03A105MO3NRNH_0201-IPC_C 5630.51,4003.46 r180 top
C25 "GRM033R6YA104KE14D" "FP-GRM033R6YA104KE14D_0201 (0603 Metric)-IPC_C" 5629.37,4224.38 r180 top
C26 "GRM033R6YA104KE14D" "FP-GRM033R6YA104KE14D_0201 (0603 Metric)-IPC_C" 5630.37,4042.21 r180 top
C27 "GRM033R6YA104KE14D" "FP-GRM033R6YA104KE14D_0201 (0603 Metric)-IPC_C" 6047.37,4128.46 r0 top
C28 "CL05A226MQ5N6J8" FP-CL05A226MQ5N6J8_0402-IPC_C 5984.12,3931.35 r270 top
C29 "CL05A226MQ5N6J8" FP-CL05A226MQ5N6J8_0402-IPC_C 5958.37,4142.46 r180 bottom
C30 "LMK063BJ224MP-F" 0201_033L 3304,4158.52 r90 top value=0.22uF
C31 "TMK063CG391JT-F" "FP-TMK063CG391JT-F_0201 (0603 Metric)-IPC_C" 3562.13,4311.22 r90 top
C32 "TMK063CG391JT-F" "FP-TMK063CG391JT-F_0201 (0603 Metric)-IPC_C" 3268.13,4312.11 r90 top
C33 "TMK063CG391JT-F" "FP-TMK063CG391JT-F_0201 (0603 Metric)-IPC_C" 3559.04,4025.1 r90 top
C34 "TMK063CG391JT-F" "FP-TMK063CG391JT-F_0201 (0603 Metric)-IPC_C" 3277.23,4022.75 r90 top
C35 "GRM033R6YA104KE14D" "FP-GRM033R6YA104KE14D_0201 (0603 Metric)-IPC_C" 5959.54,4181.25 r180 bottom
C36 "GRM033R6YA104KE14D" "FP-GRM033R6YA104KE14D_0201 (0603 Metric)-IPC_C" 6006.44,4219.38 r0 top
C37 "GRM033R6YA104KE14D" "FP-GRM033R6YA104KE14D_0201 (0603 Metric)-IPC_C" 5775.38,4411.08 r180 top
C38 "250R05L120JV4T" FP-250R05L120JV4T_0201-IPC_C 5240.41,3795.13 r180 bottom locked
C39 "250R05L120JV4T" FP-250R05L120JV4T_0201-IPC_C 5286.16,3795.3 r0 bottom locked
C40 "GRM033R6YA104KE14D" "FP-GRM033R6YA104KE14D_0201 (0603 Metric)-IPC_C" 4970.37,3934.38 r0 top locked
C41 "GCM1555C1H1R0CA16D" 0402L 5975.28,4530.78 r270 top value=1pF
C42 "CL05A106MP5NUNC" 0402_070 6310,4040 r90 top value=10uF
C43 "GRM033R6YA104KE14D" "FP-GRM033R6YA104KE14D_0201 (0603 Metric)-IPC_C" 5497.81,4202.58 r90 bottom
C44 "CL05A226MQ5N6J8" FP-CL05A226MQ5N6J8_0402-IPC_C 3430.22,4377.73 r270 top
C45 "CL05A226MQ5N6J8" FP-CL05A226MQ5N6J8_0402-IPC_C 3396.5,4377.26 r270 top
C46 "CL05A226MQ5N6J8" FP-CL05A226MQ5N6J8_0402-IPC_C 3429.83,3925.6 r90 top
C47 "CL05A226MQ5N6J8" FP-CL05A226MQ5N6J8_0402-IPC_C 3395.41,3925.76 r90 top
C48 "CL05A226MQ5N6J8" FP-CL05A226MQ5N6J8_0402-IPC_C 3836.23,4067.82 r180 bottom
C49 "CL05A226MQ5N6J8" FP-CL05A226MQ5N6J8_0402-IPC_C 4217.54,4191.28 r270 bottom
C50 "CL05A106MP5NUNC" 0402_070 3448.11,4283.77 r180 top value=10uF
C51 "CL05A106MP5NUNC" 0402_070 3385.11,4283.77 r0 top value=10uF
C52 "CL05A106MP5NUNC" 0402_070 3385.11,4033.27 r0 top value=10uF
C53 "CL05A106MP5NUNC" 0402_070 3448.11,4033.27 r180 top value=10uF
C54 "CL05A226MQ5N6J8" FP-CL05A226MQ5N6J8_0402-IPC_C 4185.58,4190.34 r270 bottom
C55 "CL05A106MP5NUNC" 0402_070 4115.16,4356.5 r90 bottom value=10uF
C56 "LMK063BJ224MP-F" 0201_033L 4166.37,4378.24 r0 bottom value=0.22uF
C57 "LMK063BJ224MP-F" 0201_033L 4168.42,4409.4 r0 bottom value=0.22uF
C58 "LMK063BJ224MP-F" 0201_033L 4125.06,4410.16 r180 bottom value=0.22uF
C59 "CL05A106MP5NUNC" 0402_070 4128.3,3985.94 r0 bottom value=10uF
C60 "LMK063BJ224MP-F" 0201_033L 4378.33,3871.66 r270 top value=0.22uF
C61 "LMK063BJ224MP-F" 0201_033L 4270.98,4185.3 r180 bottom value=0.22uF
C62 "CL05A106MP5NUNC" 0402_070 3907,4128 r0 bottom value=10uF
C63 "LMK063BJ224MP-F" 0201_033L 3737.19,4226.49 r90 top value=0.22uF
C64 "LMK063BJ224MP-F" 0201_033L 3907,4159 r0 bottom value=0.22uF
C65 "CL05A106MP5NUNC" 0402_070 3911,4188 r0 bottom value=10uF
C66 "LMK063BJ224MP-F" 0201_033L 3908.02,4218 r0 bottom value=0.22uF
C67 "LMK063BJ224MP-F" 0201_033L 3848,4327 r90 bottom value=0.22uF
C68 "LMK063BJ224MP-F" 0201_033L 3884.37,4409.24 r0 bottom value=0.22uF
C69 "GRM033R61C473KE84D" 0201_033L 3734.67,4322.98 r270 top value=0.047uF
C70 "CL05A106MP5NUNC" 0402_070 3891,4337 r180 bottom value=10uF
C71 "GRM0335C1H4R7BA01D" 0201_033L 3722.86,4065.25 r270 top value=4.7pF
C72 "GRM033R6YA104KE14D" "FP-GRM033R6YA104KE14D_0201 (0603 Metric)-IPC_C" 4853.37,4217.48 r270 top
C73 "CL05A106MP5NUNC" 0402_070 3897,4303 r180 bottom value=10uF
C74 "CL03A225MQ3CRNC" 0201L 3945.46,4346.38 r180 bottom value=2.2uF
C75 "LMK063BJ224MP-F" 0201_033L 3945.46,4409.24 r180 bottom value=0.22uF
C76 "LMK063BJ224MP-F" 0201_033L 3945.46,4377.91 r180 bottom value=0.22uF
C77 "CL05A226MQ5N6J8" FP-CL05A226MQ5N6J8_0402-IPC_C 3415.03,4422.66 r0 top
C78 "CL05A106MP5NUNC" 0402_070 4038.9,4317.13 r180 bottom value=10uF
C79 "CL03A225MQ3CRNC" 0201L 4071.88,4346.34 r0 bottom value=2.2uF
C80 "LMK063BJ224MP-F" 0201_033L 4073.37,4377.75 r0 bottom value=0.22uF
C81 "LMK063BJ224MP-F" 0201_033L 4071.88,4409.36 r0 bottom value=0.22uF
C82 "CL05A106MP5NUNC" 0402_070 4001.02,4277.32 r0 bottom value=10uF
C83 "CL03A225MQ3CRNC" 0201L 4008.9,4346.15 r0 bottom value=2.2uF
C84 "LMK063BJ224MP-F" 0201_033L 4009.24,4377.83 r0 bottom value=0.22uF
C85 "LMK063BJ224MP-F" 0201_033L 4009.24,4409.33 r0 bottom value=0.22uF
C86 "GRM033R6YA104KE14D" "FP-GRM033R6YA104KE14D_0201 (0603 Metric)-IPC_C" 5910.41,3935.32 r0 bottom
C87 "LMK063BJ224MP-F" 0201_033L 4025.62,3891.02 r0 bottom value=0.22uF
C88 "LMK063BJ224MP-F" 0201_033L 4394.91,4124.76 r0 top value=0.22uF
C89 "CGB2A1X6S0J105K033BC" 0402L 3717.5,4135.45 r180 top value=1uF
C90 "CGB2A1X6S0J105K033BC" 0402L 3717.37,4182.85 r180 top value=1uF
C91 "GRM033R6YA104KE14D" "FP-GRM033R6YA104KE14D_0201 (0603 Metric)-IPC_C" 4292.99,4035.17 r180 bottom
C92 "GRM033R6YA104KE14D" "FP-GRM033R6YA104KE14D_0201 (0603 Metric)-IPC_C" 4065.74,3883.1 r90 bottom
C93 "CL05C120JB5NNNC" 0402L 6205.98,4550.46 r180 top value=12pF
C94 "LMK063BJ224MP-F" 0201_033L 4293.19,3964.68 r180 bottom value=0.22uF
C95 "LMK063BJ224MP-F" 0201_033L 3922.37,3891.76 r90 bottom value=0.22uF
C96 "LMK063BJ224MP-F" 0201_033L 4388.37,4235.76 r90 top value=0.22uF
C97 "LMK063BJ224MP-F" 0201_033L 3779.79,4050.2 r90 bottom value=0.22uF
C98 "LMK063BJ224MP-F" 0201_033L 4388.37,4297.76 r270 top value=0.22uF
C99 "GJM1555C1H1R8BB01D" 0402L 6328.98,4550.46 r180 top value=1.8pF
C100 "CL03A105MO3NRNH" FP-CL03A105MO3NRNH_0201-IPC_C 3741.24,3861.69 r0 bottom
C101 "GRM033R6YA104KE14D" "FP-GRM033R6YA104KE14D_0201 (0603 Metric)-IPC_C" 3741,3881.17 r0 bottom
C102 "CL03A225MQ3CRNC" 0201L 4393.22,4090.26 r0 top value=2.2uF
C103 "CL03A225MQ3CRNC" 0201L 4291.98,4058.8 r180 bottom value=2.2uF
C104 "GJM1555C1H1R8BB01D" 0402L 6450.41,4530.78 r270 top value=1.8pF
C105 "GRM033R6YA104KE14D" "FP-GRM033R6YA104KE14D_0201 (0603 Metric)-IPC_C" 5402.37,4347.37 r90 bottom
C106 "GRM155R71H472KA01D" 0402L 5574,4430.51 r270 bottom value=4700pF
C107 "GRM033R6YA104KE14D" "FP-GRM033R6YA104KE14D_0201 (0603 Metric)-IPC_C" 6223.22,4433.22 r90 top
C108 "GRM033R6YA104KE14D" "FP-GRM033R6YA104KE14D_0201 (0603 Metric)-IPC_C" 6197.97,3866.01 r270 top
C109 "GRM033R6YA104KE14D" "FP-GRM033R6YA104KE14D_0201 (0603 Metric)-IPC_C" 6365.6,3768.9 r0 top
C110 "GRM155R71H472KA01D" 0402L 6440,3773.61 r90 top value=4700pF
C114 "GRM033R6YA104KE14D" "FP-GRM033R6YA104KE14D_0201 (0603 Metric)-IPC_C" 5662.76,3747.34 r180 bottom
C115 "CL03A105MO3NRNH" FP-CL03A105MO3NRNH_0201-IPC_C 5685.98,3907.2 r0 top
C116 "CL03A105MO3NRNH" FP-CL03A105MO3NRNH_0201-IPC_C 5686.69,3878.74 r0 top
C117 "GRM033R6YA104KE14D" "FP-GRM033R6YA104KE14D_0201 (0603 Metric)-IPC_C" 5334.39,4536.81 r0 bottom locked
C118 "GRM033R6YA104KE14D" "FP-GRM033R6YA104KE14D_0201 (0603 Metric)-IPC_C" 5760.69,3733.87 r270 bottom
C119 "GRM033R6YA104KE14D" "FP-GRM033R6YA104KE14D_0201 (0603 Metric)-IPC_C" 5797.1,3909.21 r90 bottom
C120 "GRM033R6YA104KE14D" "FP-GRM033R6YA104KE14D_0201 (0603 Metric)-IPC_C" 4784.37,4437.46 r90 top
C122 "CL05A106MP5NUNC" 0402_070 6260,4040 r270 top value=10uF
C123 "GRM033R6YA104KE14D" "FP-GRM033R6YA104KE14D_0201 (0603 Metric)-IPC_C" 5489.38,3956.46 r180 bottom
C125 "CL03A103KA3NNNC" FP-CL03A103KA3NNNC_0201-IPC_C 5270.83,4102.9 r0 bottom locked
C126 "GRM033R6YA104KE14D" "FP-GRM033R6YA104KE14D_0201 (0603 Metric)-IPC_C" 3679.93,4262.91 r0 top
C127 "GRM033R6YA104KE14D" "FP-GRM033R6YA104KE14D_0201 (0603 Metric)-IPC_C" 6141.37,3936.75 r180 bottom
C128 "GRM033R6YA104KE14D" "FP-GRM033R6YA104KE14D_0201 (0603 Metric)-IPC_C" 6131.47,3761.12 r180 bottom
C129 "CL03A105MO3NRNH" FP-CL03A105MO3NRNH_0201-IPC_C 6207.77,3815.74 r270 bottom
C130 "GRM033R6YA104KE14D" "FP-GRM033R6YA104KE14D_0201 (0603 Metric)-IPC_C" 4251.69,4228 r180 bottom
D1 "NSR20F30NXT5G" DSN2_0603 3229.54,4211.99 r270 bottom value=30V
D2 "NSR20F30NXT5G" DSN2_0603 4603.84,3756.88 r0 top locked value=30V
Designator1 "Comment" MHNP_M2_PANHEAD_PHILLIPS 3109.58,4791.47 r0 top
Designator1_1 "BRAKE_WAY_HOLES1X2" BRAKE_WAY_HOLES1X2 3221.89,3788.2 r180 bottom
Designator2 "BRAKE_WAY_HOLES1X2" BRAKE_WAY_HOLES1X2 3778.11,4495.01 r180 top
Designator2_1 "BRAKE_WAY_HOLES1X2" BRAKE_WAY_HOLES1X2 3778.11,3788.2 r180 bottom
Designator3 "BRAKE_WAY_HOLES1X2" BRAKE_WAY_HOLES1X2 4273.11,4495.01 r180 top
Designator3_1 "BRAKE_WAY_HOLES1X2" BRAKE_WAY_HOLES1X2 4273.11,3788.2 r180 bottom
Designator4 "BRAKE_WAY_HOLES1X2" BRAKE_WAY_HOLES1X2 4688.11,4648.59 r180 top
Designator4_1 "BRAKE_WAY_HOLES1X2" BRAKE_WAY_HOLES1X2 4688.11,3650.25 r180 bottom
Designator5 "BRAKE_WAY_HOLES1X2" BRAKE_WAY_HOLES1X2 6176.11,4648.39 r180 top
Designator5_1 "BRAKE_WAY_HOLES1X2" BRAKE_WAY_HOLES1X2 6176.11,3650.45 r180 bottom
Designator5_2 "BRAKE_WAY_HOLES1X2" BRAKE_WAY_HOLES1X2 5433.11,3650.05 r180 bottom
Designator6 "Comment" MHNP_M2_PANHEAD_PHILLIPS 6500.3,4791.47 r0 top
Designator7 "Comment" MHNP_M2_PANHEAD_PHILLIPS 3109.58,3507.37 r0 top
Designator8 "Comment" MHNP_M2_PANHEAD_PHILLIPS 6500.3,3507.37 r0 top
Designator10 "BRAKE_WAY_HOLES1X2" BRAKE_WAY_HOLES1X2 3221.89,4495.01 r180 top
Designator22_1 "Comment" MHNP_2-5 5908.96,3794.29 r0 bottom
Designator23 "Comment" MHNP_2-5 5014.62,3794.28 r0 bottom locked
FID1 "Fiducial" FIDUCIAL6.4-20 3259.58,3507.37 r0 top
FID2 "Fiducial" FIDUCIAL6.4-20 3259.58,4791.47 r0 top
FID3 "Fiducial" FIDUCIAL6.4-20 6350.3,3507.37 r0 top
FID4 "Fiducial" FIDUCIAL6.4-20 6350.3,3507.37 r180 bottom
FID5 "Fiducial" FIDUCIAL6.4-20 3259.58,4791.47 r180 bottom
FID6 "Fiducial" FIDUCIAL6.4-20 3259.58,3507.37 r180 bottom
FL1 "BLM15PD300SZ1D" 0402L 3949.54,4288.55 r90 bottom
FL2 "BLM15PD300SZ1D" 0402L 3228.8,4133.28 r90 bottom
FL3 "BLM15PD300SZ1D" 0402L 6159,3836 r270 top
FL6 "BLM15PD300SZ1D" 0402L 3153.46,4388.19 r180 top
FL7 "BLM15PD300SZ1D" 0402L 3835,4188.31 r90 bottom
FL8 "BLM15PD300SZ1D" 0402L 4170.37,4339.04 r180 bottom
FL9 "BLM15PD300SZ1D" 0402L 3881.31,4271 r180 bottom
FL10 "BLM15PD300SZ1D" 0402L 3978.37,3984.87 r0 bottom
FL11 "BLM15PD300SZ1D" 0402L 4674.94,3755.5 r180 top locked
FL12 "BLM15PD300SZ1D" 0402L 5450.1,4210.46 r180 bottom
FL14 "BLM15PD300SZ1D" 0402L 6330,4105.18 r180 top
FL20 "BLM15PD300SZ1D" 0402L 3552.13,4385.05 r180 top
FL22 "BLM15PD300SZ1D" 0402L 4843.47,3842.73 r270 top locked
J1 "105017-0001" CONN_105017-0001 3119.51,4164.78 r90 bottom
J2 "QSH-030-01-L-D-A" Samtec_QSH-030-01-X-D-A 4733.36,4144.5 r0 bottom locked
J3 "M50-3930442" FP-M50-3930442_HDR4-RECOMMENDED_LAND_PATTERN 5065.29,4581.75 r0 bottom
J4 "51441-1093" FP-51441-1093_CONN_SMD_FFC-0 4585.45,4173.34 r270 top locked
J5 "105017-0001" CONN_105017-0001 6486.85,4155.73 r90 top
J6 "51441-1093" FP-51441-1093_CONN_SMD_FFC-0 5633.17,3775.17 r0 top
J7 "GRPB052MWCN-RC" FP-GRPB052MWCN-RC_HDR10-MFG 5736.47,4571.46 r0 bottom
J8 "M50-3930342" FP-M50-3930342_HDR3-MFG 5459.37,4574.83 r0 bottom
J9 "U.FL-R-SMT-1(01)" CONN_UFL-R-SMT-1 5232.96,4283.6 r90 top
J10 "M50-3930342" FP-M50-3930342_HDR3-MFG 6582.37,3800 r90 top
L1 "LQG15HS2N4S02D" IND_LQG15H 5975.41,4324.41 r0 top value=2.4nH
L2 "MCKK2012TR47M" "FP-MCKK2012TR47M_0805 (2012 Metric)-IPC_C" 3480.98,4358.44 r270 top
L3 "MCKK2012TR47M" "FP-MCKK2012TR47M_0805 (2012 Metric)-IPC_C" 3346.24,4358.44 r270 top
L4 "MCKK2012TR47M" "FP-MCKK2012TR47M_0805 (2012 Metric)-IPC_C" 3480.98,3957.6 r90 top
L5 "MCKK2012TR47M" "FP-MCKK2012TR47M_0805 (2012 Metric)-IPC_C" 3344.24,3957.6 r90 top
L6 "LQG15HS2N4S02D" IND_LQG15H 5903.37,4396.46 r90 top value=2.4nH
L7 "MLZ2012N6R8LT000" 0805_HV 5980.15,4040.83 r90 bottom value=6.8uH
L8 "BLM18HE152SN1D" 0603L 6040.76,3919.1 r90 top value="1500 ohm"
L9 "LQG15HS2N0S02D" IND_LQG15H 5930.04,4485.35 r90 top value=2nH
L10 "LQG15HS2N0S02D" IND_LQG15H 6085.98,4550.46 r0 top value=2nH
L11 "BLM18SG260TN1D" 0603L 3892.39,4015.02 r0 bottom value="26 ohm"
L12 "BLM18SG260TN1D" 0603L 4090.19,4281.1 r180 bottom value="26 ohm"
L13 "BLM18SG260TN1D" 0603L 3242.64,4385.23 r180 top value="26 ohm"
L14 "BLM18SG260TN1D" 0603L 4121.43,4229.06 r180 bottom value="26 ohm"
LD1 "APHHS1005CGCK" APHHS1005_Green 3121.65,4188.5 r0 top value=Green
LD2 "APHHS1005CGCK" APHHS1005_Green 4607.12,4561.07 r180 top locked value=Green
LD3 "APHHS1005CGCK" APHHS1005_Green 4758.14,4558.15 r0 top value=Green
LD4 "APHHS1005CGCK" APHHS1005_Green 3600,4117.07 r0 top value=Green
LD5 "APHHS1005CGCK" APHHS1005_Green 4996.12,4338.02 r270 top value=Green
LD6 "APHHS1005CGCK" APHHS1005_Green 5736.37,4393.36 r90 top value=Green
Q1 "BSS123-7-F" FP-BSS123-7-F_SOT23-IPC_C 5082.37,4240.81 r90 top
R1 "RR0306P-103-D" FP-RR0306P-103-D_0201-IPC_C 5577.06,4028.97 r90 bottom
R2 "RC0201JR-070RL" "FP-RC0201JR-070RL_0201 (0603 Metric)-MFG" 4295.7,4110.3 r270 bottom
R3 "RR0306P-103-D" FP-RR0306P-103-D_0201-IPC_C 3793.63,3912.76 r180 bottom
R4 "CRCW0201100KFKED" 0201L 3717.54,4429.01 r180 top value=100k
R5 "CRCW0201100KFKED" 0201L 4378.13,4374.27 r270 top value=100k
R6 "CRCW020133R2FNED" 0201L 3706.27,4022.49 r270 bottom value=33.2
R7 "RR0306P-103-D" FP-RR0306P-103-D_0201-IPC_C 3944.52,3889.21 r90 bottom
R8 "RR0306P-103-D" FP-RR0306P-103-D_0201-IPC_C 3916.9,3972.12 r180 bottom
R9 "CRCW0201100KFKED" 0201L 3835,3920.2 r270 bottom value=100k
R10 "AC0201FR-0720RL" FP-AC0201FR-0720RL_0201-IPC_C 4917.01,3921 r180 bottom
R11 "AC0201FR-0720RL" FP-AC0201FR-0720RL_0201-IPC_C 4950.01,3937.94 r180 bottom
R12 "RC0201JR-070RL" "FP-RC0201JR-070RL_0201 (0603 Metric)-MFG" 4929.17,4495.46 r0 bottom
R13 "RC0201JR-07220RL" 0201L 4636.42,4516.76 r180 top locked value=220
R14 "RC0201JR-070RL" "FP-RC0201JR-070RL_0201 (0603 Metric)-MFG" 4886,4506.26 r90 top
R15 "RC0201JR-07220RL" 0201L 3663,4121.49 r90 top value=220
R16 "RC0201FR-077K87L" 0201L 5566.39,4484.46 r180 top value=7.87k
R17 "RC0201JR-07220RL" 0201L 5736.37,4328.17 r90 top value=220
R18 "RR0306P-103-D" FP-RR0306P-103-D_0201-IPC_C 5363.78,4038.98 r270 bottom
R19 "RR0306P-103-D" FP-RR0306P-103-D_0201-IPC_C 3605.65,4252.67 r270 top
R20 "RR0306P-103-D" FP-RR0306P-103-D_0201-IPC_C 6072.37,3988.94 r180 bottom
R21 "RR0306P-103-D" FP-RR0306P-103-D_0201-IPC_C 4318.97,4310.76 r0 bottom
R22 "RR0306P-103-D" FP-RR0306P-103-D_0201-IPC_C 4318.97,4288.76 r0 bottom
R23 "RR0306P-103-D" FP-RR0306P-103-D_0201-IPC_C 4301.24,4249.29 r0 bottom
R24 "CRCW0402200RFKEDHP" FP-CRCW0402200RFKEDHP_0402-IPC_C 6071.37,3937.46 r180 bottom
R25 "RC0201FR-074K99L" 0201L 3292.98,4200.49 r180 top value=4.99k
R26 "RC0201FR-074K99L" 0201L 3292.13,4116.99 r180 top value=4.99k
R27 "RC0201JR-07510RL" 0201L 6094.58,3752.54 r90 bottom value=510
R28 "RC0201JR-070RL" "FP-RC0201JR-070RL_0201 (0603 Metric)-MFG" 3538.8,4195 r180 top
R29 "CRCW0201100KFKED" 0201L 6072.37,3965.94 r180 bottom value=100k
R30 "RC0201JR-070RL" "FP-RC0201JR-070RL_0201 (0603 Metric)-MFG" 5221.5,4404.87 r0 bottom locked
R31 "RC0201JR-070RL" "FP-RC0201JR-070RL_0201 (0603 Metric)-MFG" 5010.5,4008.93 r0 bottom
R32 "RC0201JR-070RL" "FP-RC0201JR-070RL_0201 (0603 Metric)-MFG" 3539.13,4171 r180 top
R33 "RC0201FR-074K99L" 0201L 3292.13,4088.65 r180 top value=4.99k
R34 "RC0201FR-074K99L" 0201L 3541.5,4220.5 r0 top value=4.99k
R35 "RR0306P-103-D" FP-RR0306P-103-D_0201-IPC_C 3292.52,4231 r180 top
R36 "RR0306P-103-D" FP-RR0306P-103-D_0201-IPC_C 3524.56,4098.79 r270 top
R37 "CRCW0201100KFKED" 0201L 5009.23,3983.33 r180 bottom value=100k
R38 "RC0201FR-074K99L" 0201L 5282.68,4235.46 r0 bottom value=4.99k
R39 "RC0201JR-07510RL" 0201L 3090.67,4224.06 r0 top value=510
R40 "RC0201FR-074K99L" 0201L 3660.79,4145.37 r0 bottom value=4.99k
R41 "RC0201JR-070RL" "FP-RC0201JR-070RL_0201 (0603 Metric)-MFG" 3825.31,4374.62 r90 bottom
R42 "RC0201JR-07220RL" 0201L 4799.25,4494.23 r270 top locked value=220
R43 "RR0306P-103-D" FP-RR0306P-103-D_0201-IPC_C 3630.7,3875.43 r0 bottom
R44 "RR0306P-103-D" FP-RR0306P-103-D_0201-IPC_C 3619.37,4059.85 r0 bottom
R45 "RR0306P-103-D" FP-RR0306P-103-D_0201-IPC_C 3809.22,3978.91 r0 bottom
R46 "CRCW020133R2FNED" 0201L 3595.37,3913.81 r90 bottom value=33.2
R47 "CRCW020133R2FNED" 0201L 3734.37,4022.49 r270 bottom value=33.2
R48 "CRCW020133R2FNED" 0201L 3608.37,4021.09 r270 bottom value=33.2
R49 "CRCW020133R2FNED" 0201L 3771.3,3947.76 r270 bottom value=33.2
R50 "RC0201JR-071KL" 0201L 3197.4,4327.73 r0 top value=1.0k
R51 "RC0201JR-070RL" "FP-RC0201JR-070RL_0201 (0603 Metric)-MFG" 5230.37,4240.37 r270 bottom locked
R52 "RC0201FR-071K96L" 0201L 3141.4,4327.36 r0 top value=1.96k
R53 "RC0402FR-073R83L" "FP-RC0402FR-073R83L_0402 (1005 Metric)-IPC_C" 3532.13,4316.35 r90 top
R54 "RC0402FR-073R83L" "FP-RC0402FR-073R83L_0402 (1005 Metric)-IPC_C" 3295.13,4316.07 r90 top
R55 "RC0402FR-073R83L" "FP-RC0402FR-073R83L_0402 (1005 Metric)-IPC_C" 3544.13,3985.35 r180 top
R56 "RC0402FR-073R83L" "FP-RC0402FR-073R83L_0402 (1005 Metric)-IPC_C" 3279.13,3985.21 r0 top
R57 "RC0201JR-070RL" "FP-RC0201JR-070RL_0201 (0603 Metric)-MFG" 5180.56,4149.19 r270 bottom locked
R58 "RC0201JR-070RL" "FP-RC0201JR-070RL_0201 (0603 Metric)-MFG" 5008.99,4036.94 r180 bottom
R59 "RR0306P-103-D" FP-RR0306P-103-D_0201-IPC_C 4301.24,4224.76 r0 bottom
R60 "RC0201JR-070RL" "FP-RC0201JR-070RL_0201 (0603 Metric)-MFG" 3846.82,4374.62 r90 bottom
R61 "RC0201JR-070RL" "FP-RC0201JR-070RL_0201 (0603 Metric)-MFG" 3577.24,4245.78 r270 bottom
R62 "RC0201JR-070RL" "FP-RC0201JR-070RL_0201 (0603 Metric)-MFG" 3662,4416.56 r90 bottom
R63 "RC0201JR-070RL" "FP-RC0201JR-070RL_0201 (0603 Metric)-MFG" 3604,4154.79 r270 bottom
R64 "RC0201FR-074K99L" 0201L 3715.38,4103.78 r90 bottom value=4.99k
R65 "RR0306P-103-D" FP-RR0306P-103-D_0201-IPC_C 3708.05,4143.04 r0 bottom
R66 "RC0201JR-070RL" "FP-RC0201JR-070RL_0201 (0603 Metric)-IPC_C" 4982.89,4434.77 r0 top
R67 "RC0201JR-070RL" "FP-RC0201JR-070RL_0201 (0603 Metric)-MFG" 5508.37,3935.46 r0 bottom
R68 "RC0201JR-070RL" "FP-RC0201JR-070RL_0201 (0603 Metric)-MFG" 5508.37,3935.46 r0 top
R69 "RC0201FR-074K99L" 0201L 5511.07,3729.96 r0 bottom value=4.99k
R70 "RC0201JR-070RL" "FP-RC0201JR-070RL_0201 (0603 Metric)-MFG" 5435.37,3870.14 r0 bottom
R71 "RC0201JR-070RL" "FP-RC0201JR-070RL_0201 (0603 Metric)-MFG" 5383.33,3793.46 r270 bottom
R72 "RC0201JR-070RL" "FP-RC0201JR-070RL_0201 (0603 METRIC)-IPC_C" 5433.38,3894.46 r180 bottom
R73 "RC0201JR-070RL" "FP-RC0201JR-070RL_0201 (0603 METRIC)-IPC_C" 5433.37,3917.06 r180 bottom
R74 "RC0201JR-070RL" "FP-RC0201JR-070RL_0201 (0603 METRIC)-IPC_C" 4896.36,3879.46 r0 top locked
R75 "RC0201JR-071KL" 0201L 3875.37,3907.8 r270 bottom value=1.0k
R76 "RC0201JR-070RL" "FP-RC0201JR-070RL_0201 (0603 METRIC)-IPC_C" 5698.97,3903.45 r90 bottom
R77 "RR0306P-103-D" FP-RR0306P-103-D_0201-IPC_C 5163.43,4030.06 r270 bottom locked
R78 "RR0306P-103-D" FP-RR0306P-103-D_0201-IPC_C 5164.52,3976.35 r270 bottom locked
R79 "ERJ-1GNF4701C" FP-ERJ-1GNF4701C_0201-IPC_C 5788.67,3846.46 r90 bottom
R80 "RR0306P-103-D" FP-RR0306P-103-D_0201-IPC_C 5123,3920.48 r90 bottom
R81 "RR0306P-103-D" FP-RR0306P-103-D_0201-IPC_C 5344.92,4081.19 r180 bottom locked
R82 "RR0306P-103-D" FP-RR0306P-103-D_0201-IPC_C 5272.85,4040.2 r270 bottom
R83 "RR0306P-103-D" FP-RR0306P-103-D_0201-IPC_C 4277.8,4155.3 r180 bottom
R84 "RR0306P-103-D" FP-RR0306P-103-D_0201-IPC_C 4119.89,3922.4 r0 bottom
R85 "RR0306P-103-D" FP-RR0306P-103-D_0201-IPC_C 4355.44,4224.99 r0 bottom
R86 "RC0201JR-070RL" "FP-RC0201JR-070RL_0201 (0603 METRIC)-IPC_C" 5629.22,4180.57 r0 top
R87 "RC0201JR-070RL" "FP-RC0201JR-070RL_0201 (0603 METRIC)-IPC_C" 5629.37,4202.46 r0 top
R88 "AC0201FR-0720RL" FP-AC0201FR-0720RL_0201-IPC_C 4778.18,4060.33 r180 top locked
R89 "CRCW0201100KFKED" 0201L 5826.38,4411.08 r0 top value=100k
R90 "RC0201JR-070RL" "FP-RC0201JR-070RL_0201 (0603 METRIC)-IPC_C" 5837.39,4321.29 r180 bottom
R91 "RC0201JR-070RL" "FP-RC0201JR-070RL_0201 (0603 METRIC)-IPC_C" 5910.14,3926.46 r180 top
R92 "CRCW0201100KFKED" 0201L 6039.37,3742.65 r270 bottom value=100k
R93 "RR0306P-103-D" FP-RR0306P-103-D_0201-IPC_C 5126.93,4030.08 r90 bottom locked
R94 "RR0306P-103-D" FP-RR0306P-103-D_0201-IPC_C 5286.18,4537.08 r0 bottom locked
R95 "RR0306P-103-D" FP-RR0306P-103-D_0201-IPC_C 5222.16,4444.39 r180 bottom locked
R96 "RR0306P-103-D" FP-RR0306P-103-D_0201-IPC_C 5162.8,3928.09 r90 bottom locked
R97 "RC0201JR-070RL" "FP-RC0201JR-070RL_0201 (0603 METRIC)-IPC_C" 5309.27,4040.92 r90 bottom
R98 "RR0306P-103-D" FP-RR0306P-103-D_0201-IPC_C 5128.47,3976.25 r90 bottom locked
R99 "RC0201JR-070RL" "FP-RC0201JR-070RL_0201 (0603 METRIC)-IPC_C" 5222.1,4479.52 r180 bottom locked
R100 "RC0201JR-070RL" "FP-RC0201JR-070RL_0201 (0603 METRIC)-IPC_C" 5320.66,4357.38 r0 bottom
R101 "RC0201JR-070RL" "FP-RC0201JR-070RL_0201 (0603 METRIC)-IPC_C" 5222.36,4510.46 r180 bottom
R102 "RC0201JR-070RL" "FP-RC0201JR-070RL_0201 (0603 METRIC)-IPC_C" 5792.03,4320.41 r0 bottom
R103 "RC0201JR-070RL" "FP-RC0201JR-070RL_0201 (0603 METRIC)-IPC_C" 4355.64,4245.1 r0 bottom
R104 "RR0306P-103-D" FP-RR0306P-103-D_0201-IPC_C 4966.89,3965.95 r0 top locked
R105 "RC0201JR-070RL" "FP-RC0201JR-070RL_0201 (0603 METRIC)-IPC_C" 4865.78,3995.57 r90 top
R106 "RC0201JR-070RL" "FP-RC0201JR-070RL_0201 (0603 METRIC)-IPC_C" 4902.35,3985.56 r0 top locked
R107 "RC0201JR-07510RL" 0201L 5063.61,4357.18 r180 top value=510
R108 "RC0201JR-07510RL" 0201L 5035.32,4159.98 r0 top value=510
R109 "RC0201JR-070RL" "FP-RC0201JR-070RL_0201 (0603 Metric)-MFG" 3732.14,4012.38 r0 top
R110 "RR0306P-103-D" FP-RR0306P-103-D_0201-IPC_C 5309.89,3724.46 r0 top
R111 "RC0201JR-07220RL" 0201L 5137.39,4116.46 r0 top value=220
R112 "RC0201JR-070RL" "FP-RC0201JR-070RL_0201 (0603 METRIC)-IPC_C" 5259.36,4367.46 r0 bottom
R113 "RC0201JR-070RL" "FP-RC0201JR-070RL_0201 (0603 METRIC)-IPC_C" 5258.37,4445.48 r270 top
R114 "CRCW040261R9FKED" 0402L 6397.76,3909.29 r270 top value=61.9
R115 "RC0201JR-070RL" "FP-RC0201JR-070RL_0201 (0603 Metric)-IPC_C" 6342.98,3961 r0 top
R116 "RC0201JR-070RL" "FP-RC0201JR-070RL_0201 (0603 Metric)-IPC_C" 6242.98,3956 r0 top
R117 "CRCW040261R9FKED" 0402L 6397.85,3823.52 r270 top value=61.9
R118 "RR0306P-103-D" FP-RR0306P-103-D_0201-IPC_C 6185,4422 r90 top
R119 "CRCW040261R9FKED" 0402L 5520.06,4410.82 r180 bottom value=61.9
R120 "RC0201JR-070RL" "FP-RC0201JR-070RL_0201 (0603 Metric)-IPC_C" 6291,4252.99 r90 top
R121 "RC0201JR-070RL" "FP-RC0201JR-070RL_0201 (0603 METRIC)-IPC_C" 6137.23,4333.23 r180 top
R122 "RR0306P-103-D" FP-RR0306P-103-D_0201-IPC_C 5568.37,4347.11 r270 bottom
R123 "RC0201JR-070RL" "FP-RC0201JR-070RL_0201 (0603 METRIC)-IPC_C" 5562.87,4257.76 r90 bottom
R124 "RR0306P-103-D" FP-RR0306P-103-D_0201-IPC_C 4864.68,4471.7 r0 top
R125 "RR0306P-103-D" FP-RR0306P-103-D_0201-IPC_C 5087.65,3914.04 r0 top
R126 "CRCW040261R9FKED" 0402L 5445.1,4410.54 r180 bottom value=61.9
R127 "RC0201JR-070RL" "FP-RC0201JR-070RL_0201 (0603 METRIC)-IPC_C" 6137.99,4310 r0 top
R128 "RC0201JR-070RL" "FP-RC0201JR-070RL_0201 (0603 METRIC)-IPC_C" 6183.91,4240.71 r180 top
R129 "RC0201JR-070RL" "FP-RC0201JR-070RL_0201 (0603 METRIC)-IPC_C" 5125.2,3925.93 r90 top
R130 "AC0201FR-0720RL" FP-AC0201FR-0720RL_0201-IPC_C 4617.95,4372.15 r270 top locked
R131 "RC0201JR-070RL" "FP-RC0201JR-070RL_0201 (0603 METRIC)-IPC_C" 5809.36,3978.41 r180 bottom
R132 "AC0201FR-0720RL" FP-AC0201FR-0720RL_0201-IPC_C 4777.33,4090.57 r180 top locked
R133 "AC0201FR-0720RL" FP-AC0201FR-0720RL_0201-IPC_C 4740.67,4227.63 r180 top locked
R134 "RR0306P-103-D" FP-RR0306P-103-D_0201-IPC_C 6388.49,3961 r0 top
R135 "AC0201FR-0720RL" FP-AC0201FR-0720RL_0201-IPC_C 4722.06,4196.8 r180 top locked
R136 "RC0201JR-070RL" "FP-RC0201JR-070RL_0201 (0603 Metric)-IPC_C" 6238.01,4241 r0 top
R137 "AC0201FR-0720RL" FP-AC0201FR-0720RL_0201-IPC_C 4681.54,3924.7 r90 top locked
R138 "AC0201FR-0720RL" FP-AC0201FR-0720RL_0201-IPC_C 4767.38,4284.46 r180 top
R139 "RC0201JR-070RL" "FP-RC0201JR-070RL_0201 (0603 Metric)-IPC_C" 6313,4252.99 r270 top
R140 "AC0201FR-0720RL" FP-AC0201FR-0720RL_0201-IPC_C 4714.81,3924.69 r90 top locked
R141 "RC0201FR-074K99L" 0201L 6248.22,4429.26 r90 top value=4.99k
R158 "RC0201FR-0782K5L" 0201L 4228.2,4119.6 r0 bottom value=82.5k
R159 "RC0201JR-07750RL" 0201L 4223.5,4078.1 r270 bottom value=750
R160 "RC0201JR-070RL" "FP-RC0201JR-070RL_0201 (0603 METRIC)-IPC_C" 5768.53,3903.27 r90 bottom
R161 "RC0201JR-070RL" "FP-RC0201JR-070RL_0201 (0603 METRIC)-IPC_C" 5629.37,4158.46 r0 top
R166 "RC0201JR-070RL" "FP-RC0201JR-070RL_0201 (0603 METRIC)-IPC_C" 5728.8,3903.59 r90 bottom
R168 "RC0201JR-070RL" "FP-RC0201JR-070RL_0201 (0603 METRIC)-IPC_C" 5653.43,3903.57 r90 bottom
R170 "RC0201FR-0782K5L" 0201L 4154.35,3946.46 r180 bottom value=82.5k
R171 "RC0201JR-07750RL" 0201L 4204.44,3980.18 r0 bottom value=750
R172 "RC0201FR-0782K5L" 0201L 4401.11,4142.03 r90 bottom value=82.5k
R174 "RC0201FR-077K87L" 0201L 4269.1,4113.8 r90 bottom value=7.87k
R176 "RC0201FR-077K87L" 0201L 4389.6,4181.8 r0 bottom value=7.87k
R177 "RR0306P-103-D" FP-RR0306P-103-D_0201-IPC_C 4849.59,4099.95 r90 top
R178 "RR0306P-103-D" FP-RR0306P-103-D_0201-IPC_C 4918.69,4169.46 r180 top
R180 "ERJ-1GNF4701C" FP-ERJ-1GNF4701C_0201-IPC_C 5653.37,3789.15 r270 bottom
R181 "ERJ-1GNF4701C" FP-ERJ-1GNF4701C_0201-IPC_C 5639.79,3901.65 r90 top
R182 "RC0201JR-070RL" "FP-RC0201JR-070RL_0201 (0603 METRIC)-IPC_C" 4650.14,4371.83 r270 top locked
R183 "RC0201JR-070RL" "FP-RC0201JR-070RL_0201 (0603 METRIC)-IPC_C" 5593.19,3884.84 r90 top
R184 "RC0201JR-070RL" "FP-RC0201JR-070RL_0201 (0603 METRIC)-IPC_C" 5562.38,3883.78 r90 top
R185 "RC0201JR-070RL" "FP-RC0201JR-070RL_0201 (0603 METRIC)-IPC_C" 5521.36,3882.46 r180 top
RA1 "EXB-18VR000X" FP-EXB-18VR000X_0502-MFG 4733.17,4479.49 r180 top locked
RA2 "EXB-18VR000X" FP-EXB-18VR000X_0502-MFG 4580.6,4423.99 r180 top locked
RA3 "EXB-18VR000X" FP-EXB-18VR000X_0502-MFG 4772.94,3873.84 r0 top locked
RA4 "EXB-18VR000X" FP-EXB-18VR000X_0502-MFG 4620.57,3957.49 r0 top locked
RA5 "EXB-18VR000X" FP-EXB-18VR000X_0502-MFG 4941.51,4432.71 r90 bottom locked
RA6 "EXB-18VR000X" FP-EXB-18VR000X_0502-MFG 4941.09,4327.39 r90 bottom locked
RA7 "EXB-18VR000X" FP-EXB-18VR000X_0502-MFG 4942.52,4213.65 r90 bottom locked
RA8 "EXB-18VR000X" FP-EXB-18VR000X_0502-MFG 4941.86,4095.87 r90 bottom locked